# Altium PCB AEON.Feeder.ApplicationBoard.PcbDoc
Units mm, origin at the board's own origin, x right, y up, seen from the top; angles counter-clockwise.
Board outline 58 x 51.33 mm, 4 copper layers (Top Layer, Int1, Int2, Bottom Layer), stack 1.492 mm thick; 33 components, 28 nets, 175 pads, 27 vias.
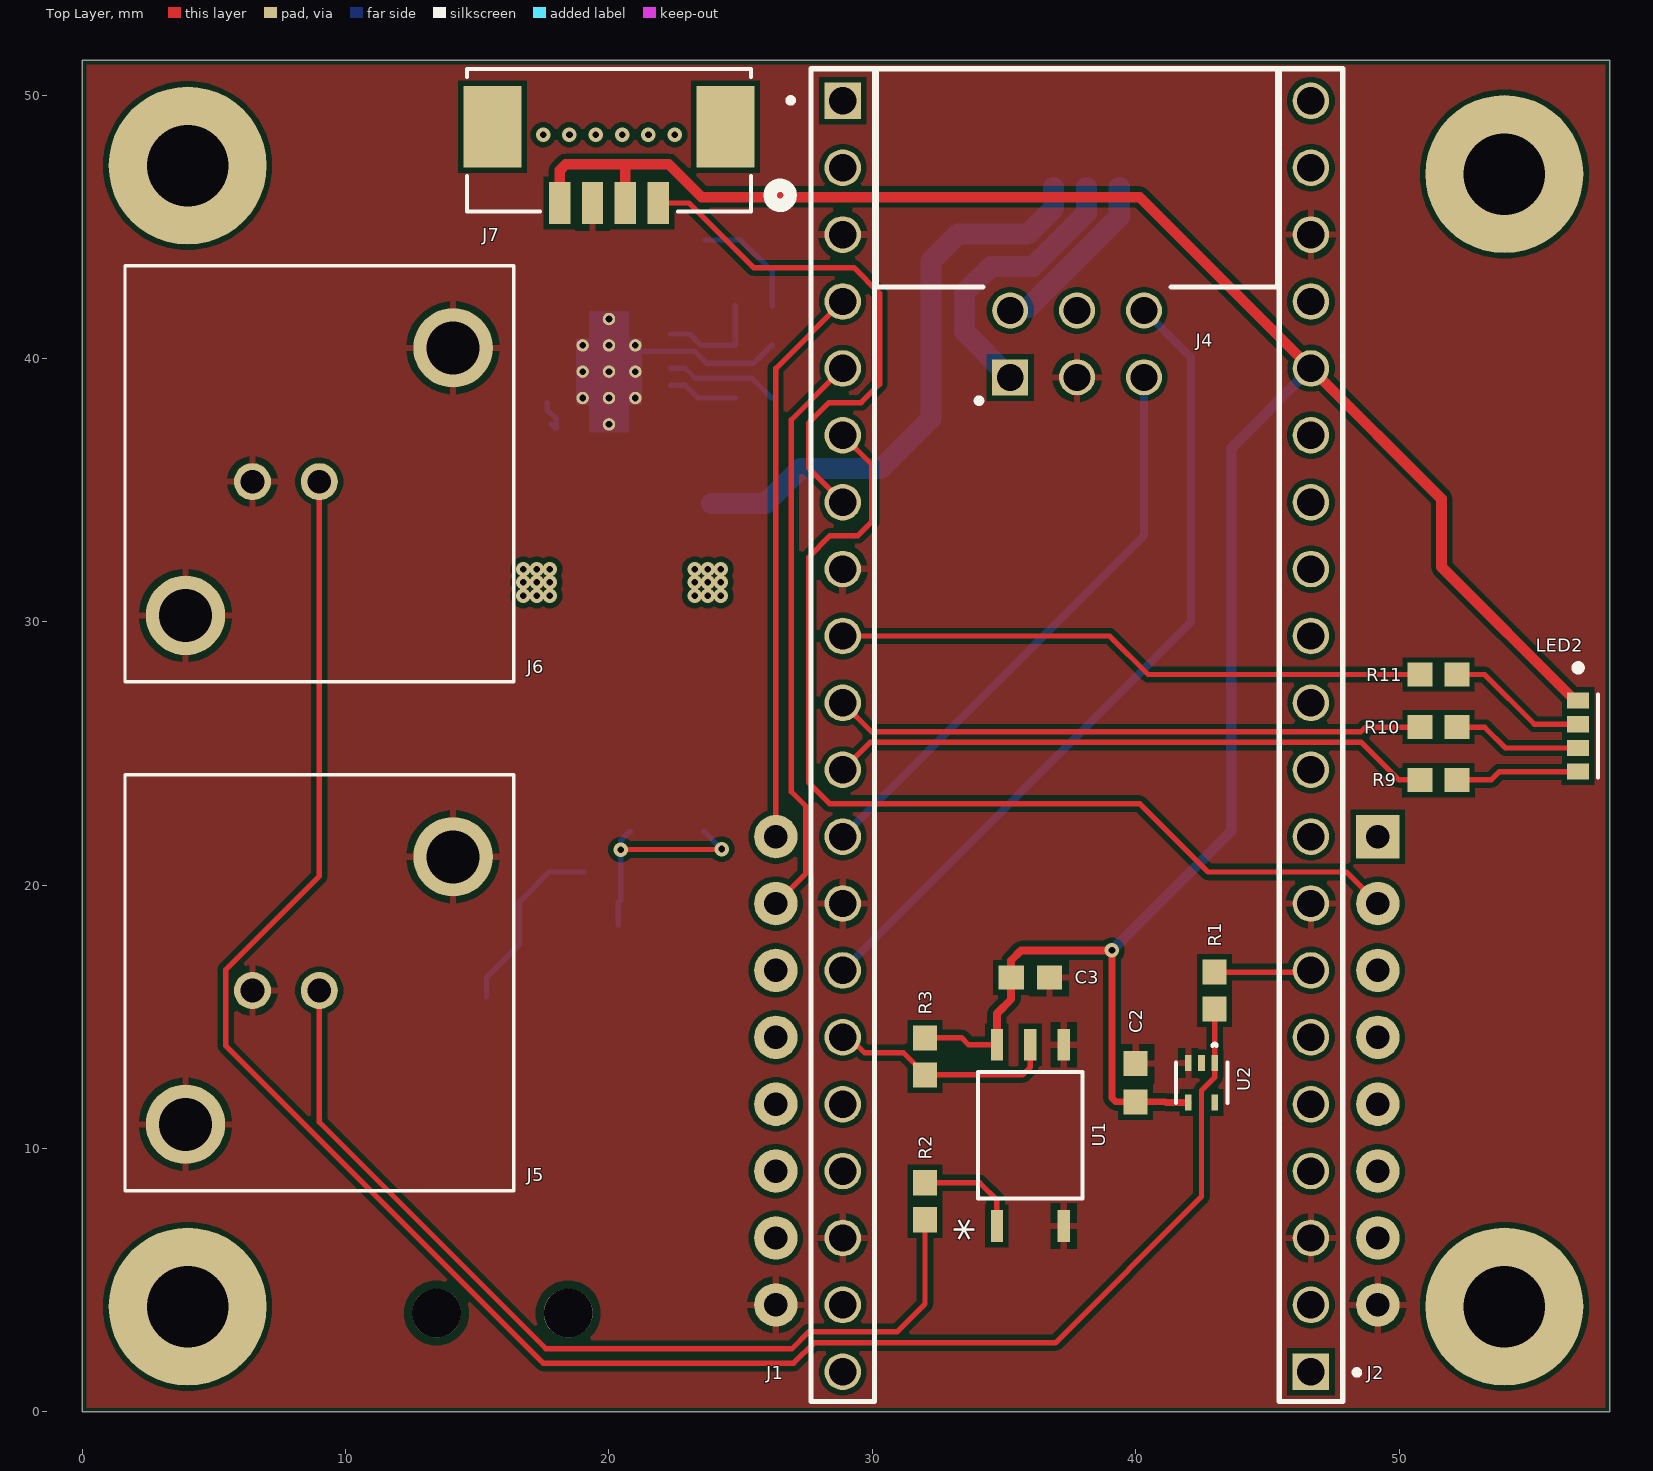
[diagram p0: Top Layer view]
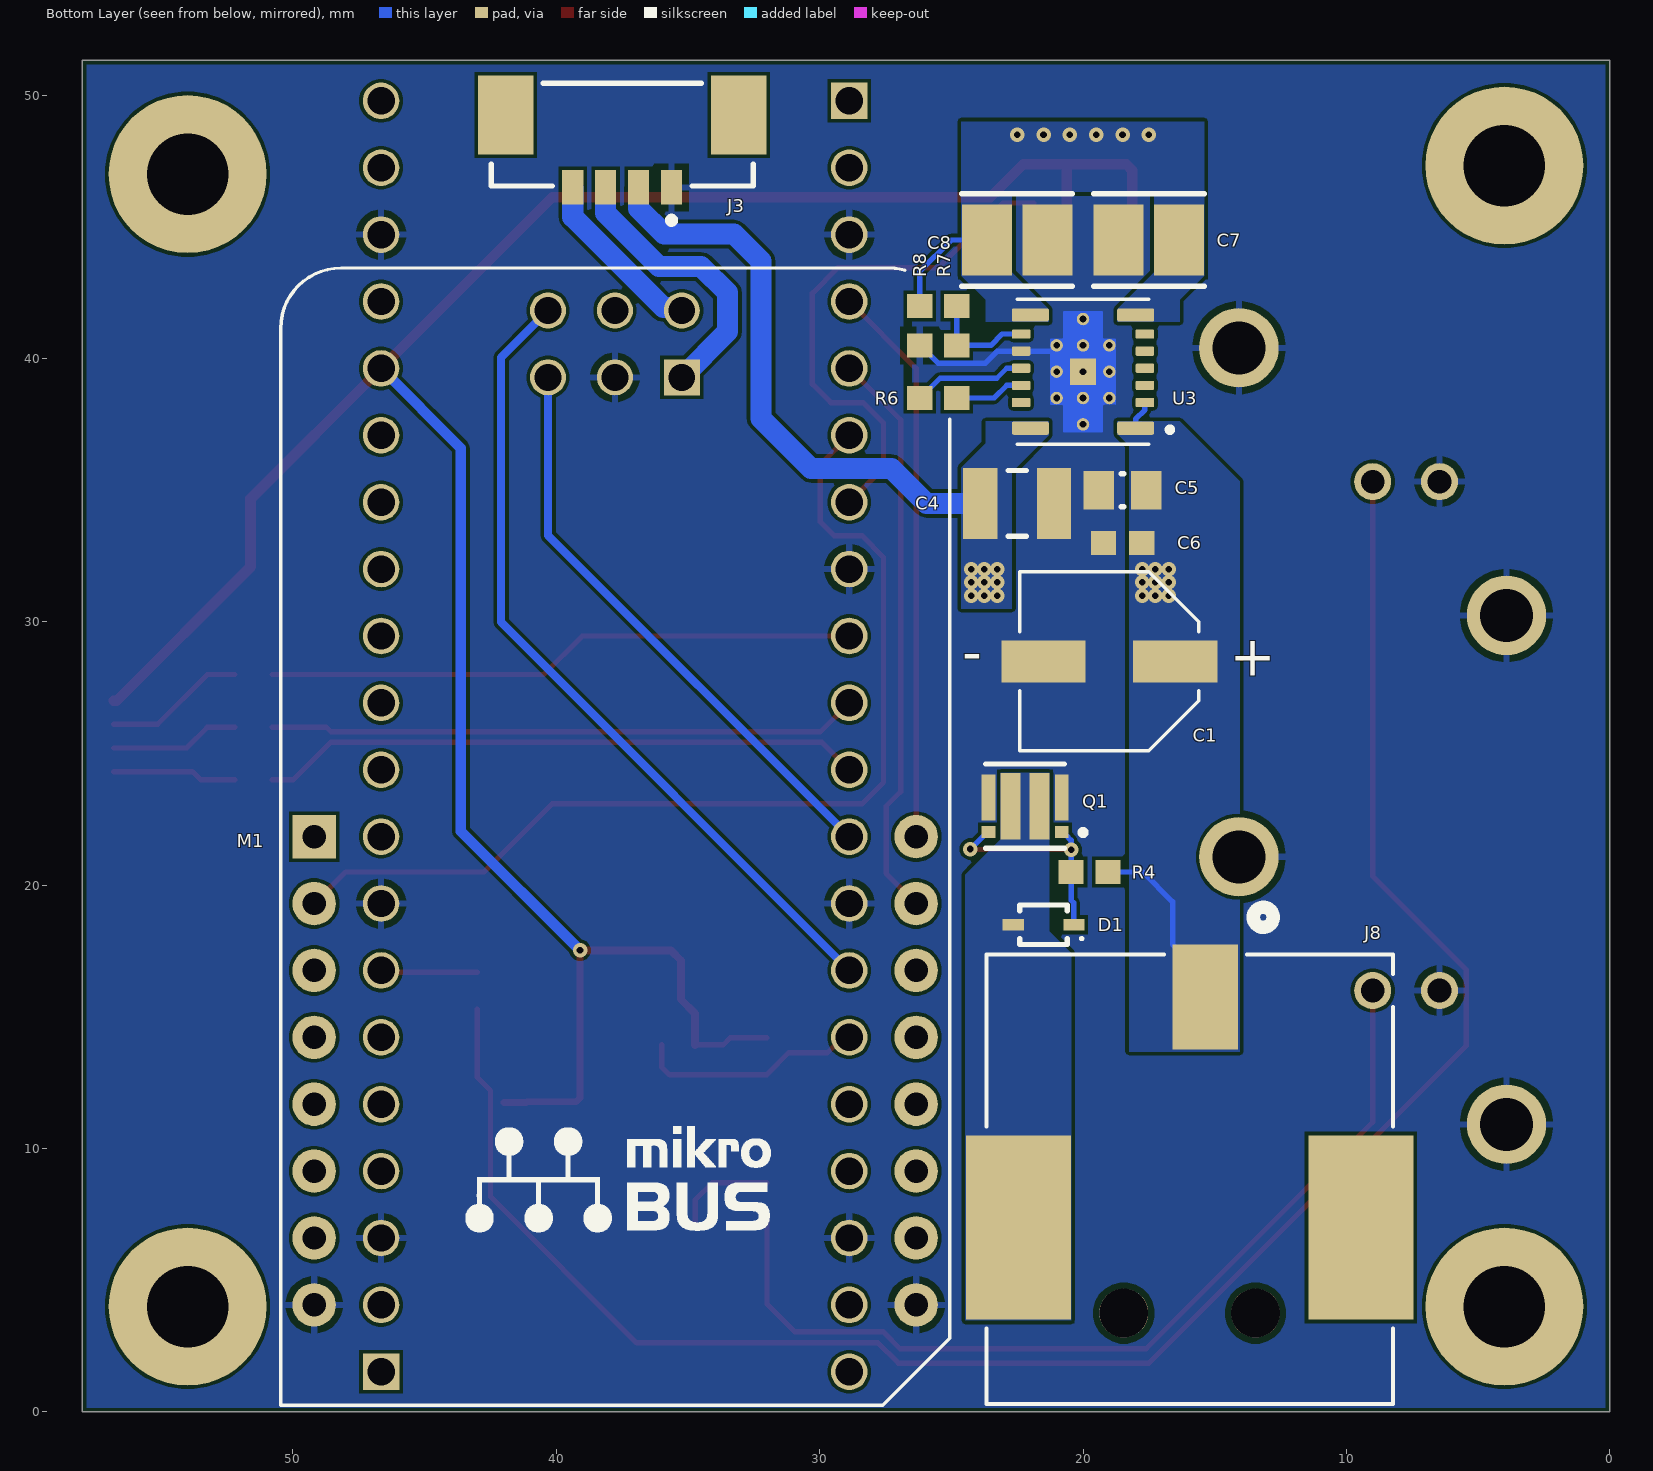
[diagram p1: Bottom Layer view, seen from below]
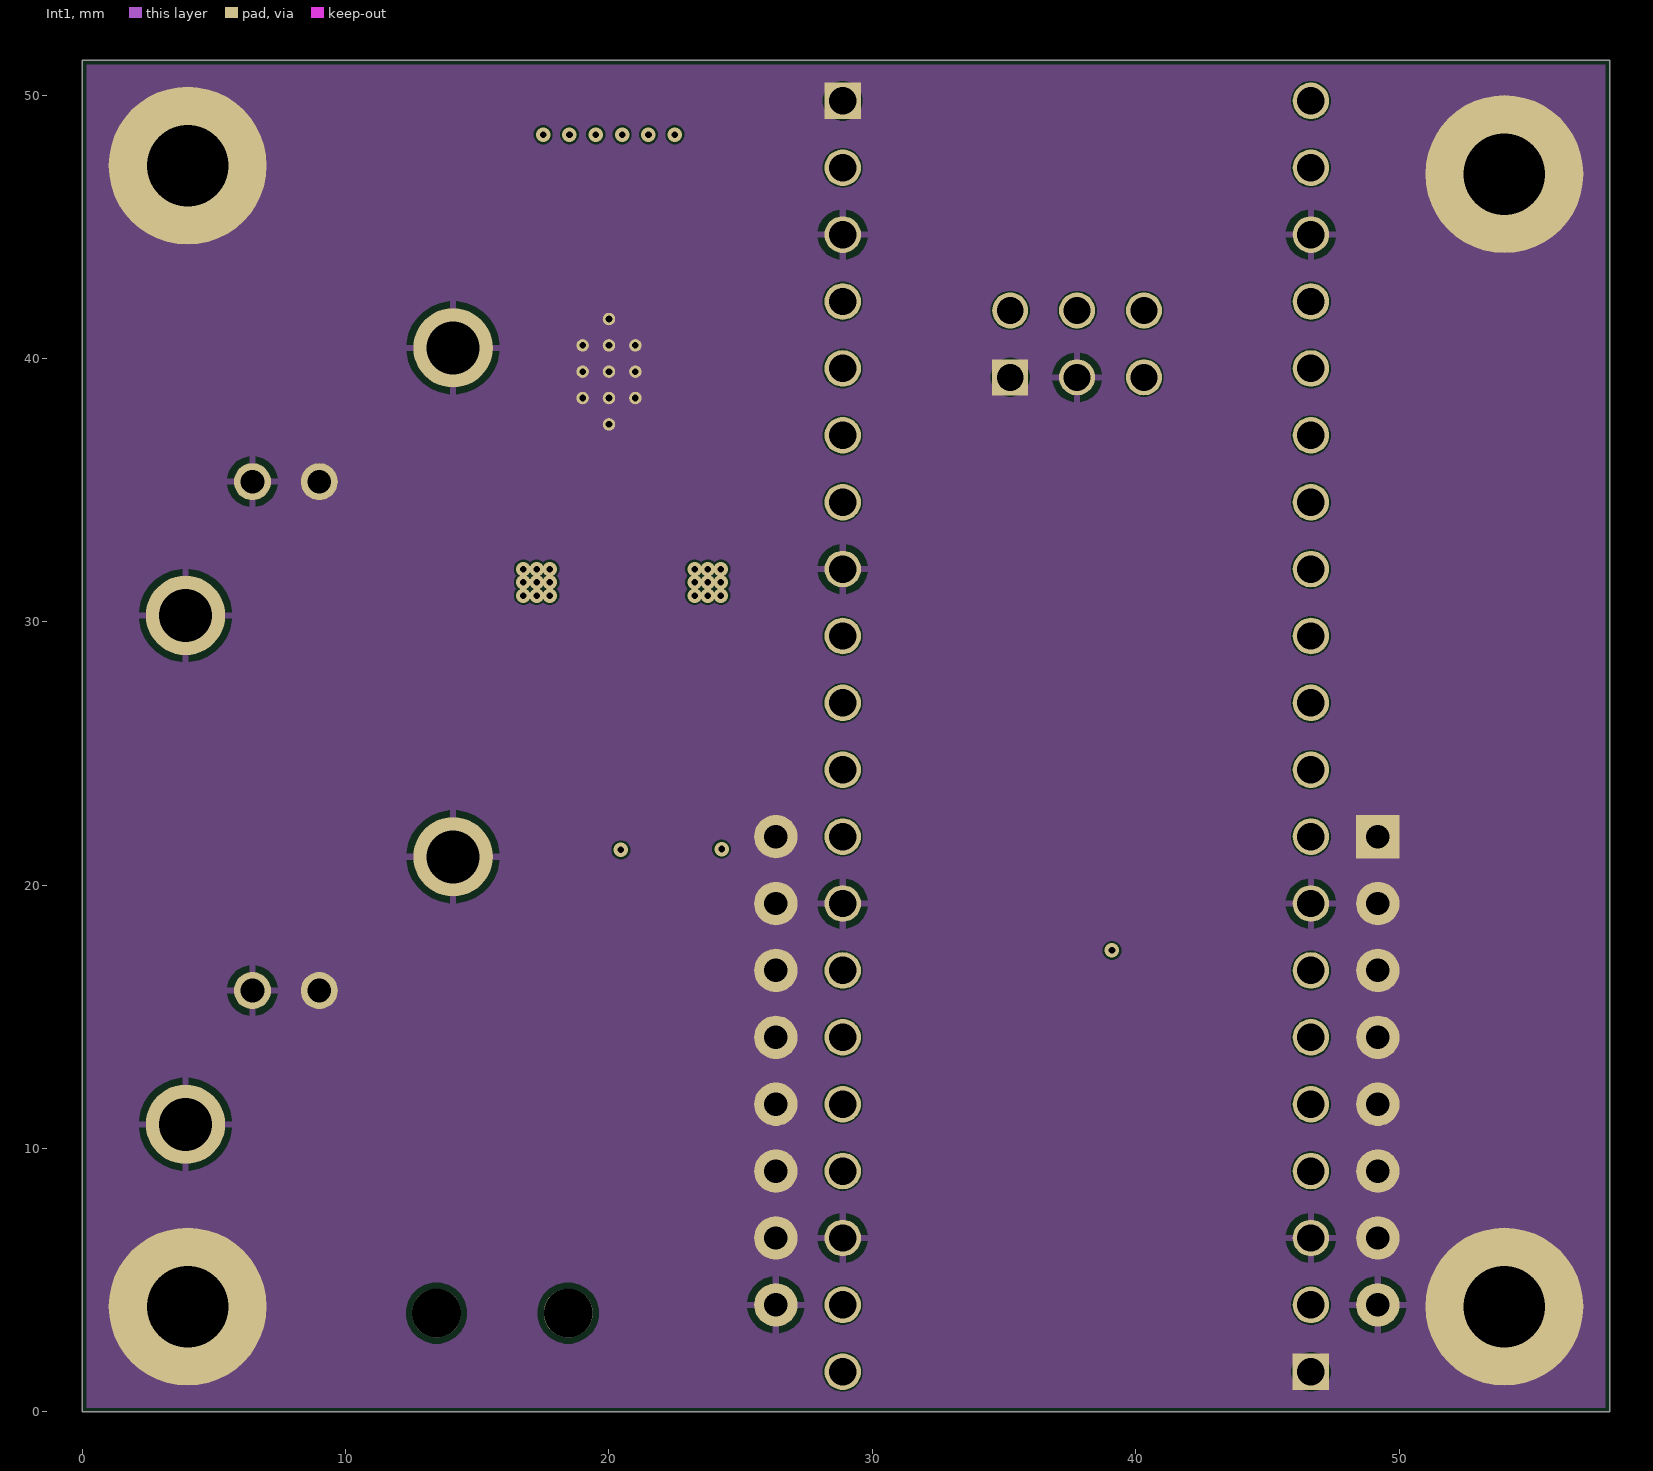
[diagram p2: Int1]
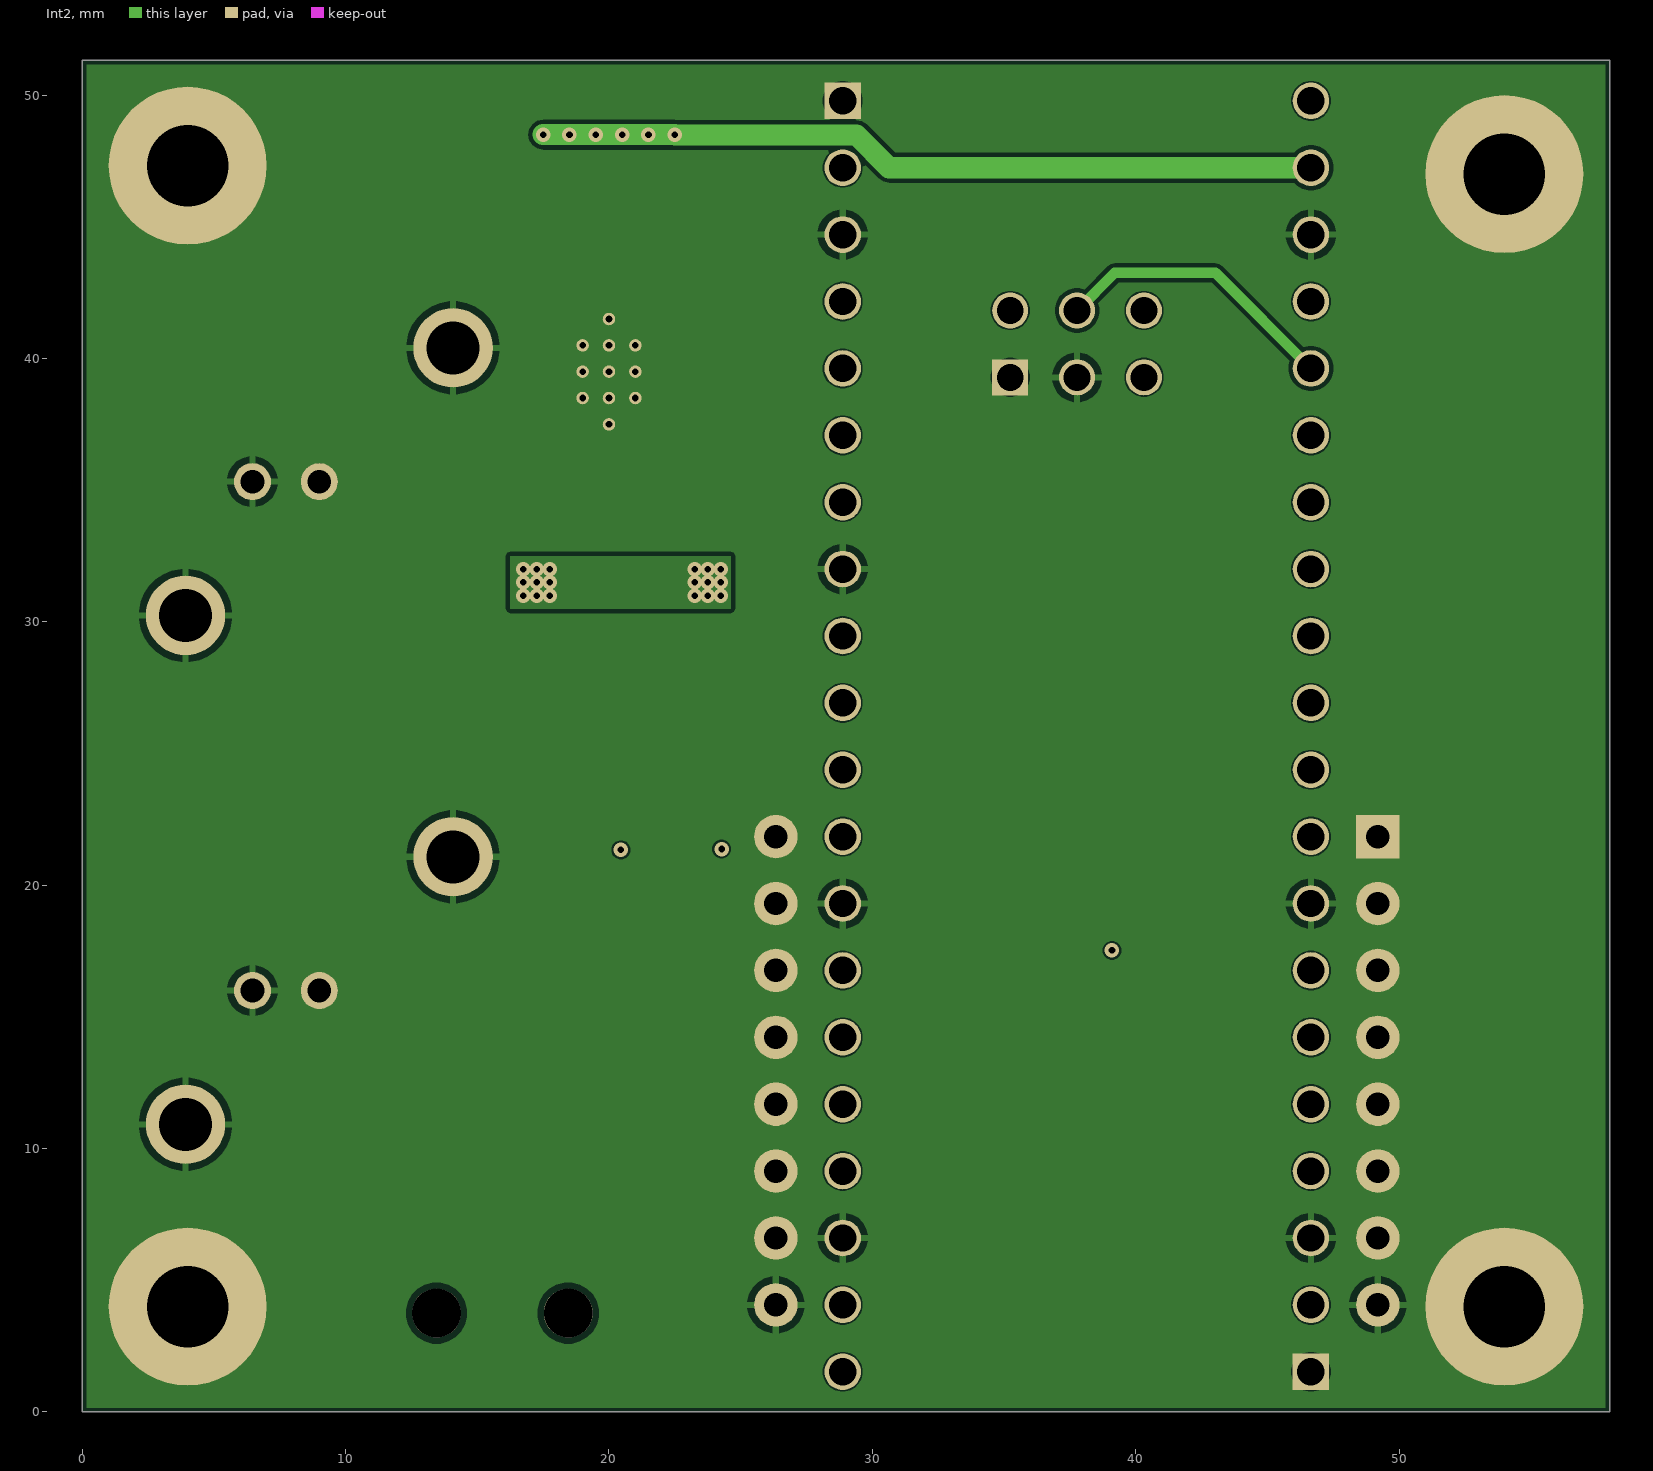
[diagram p3: Int2]
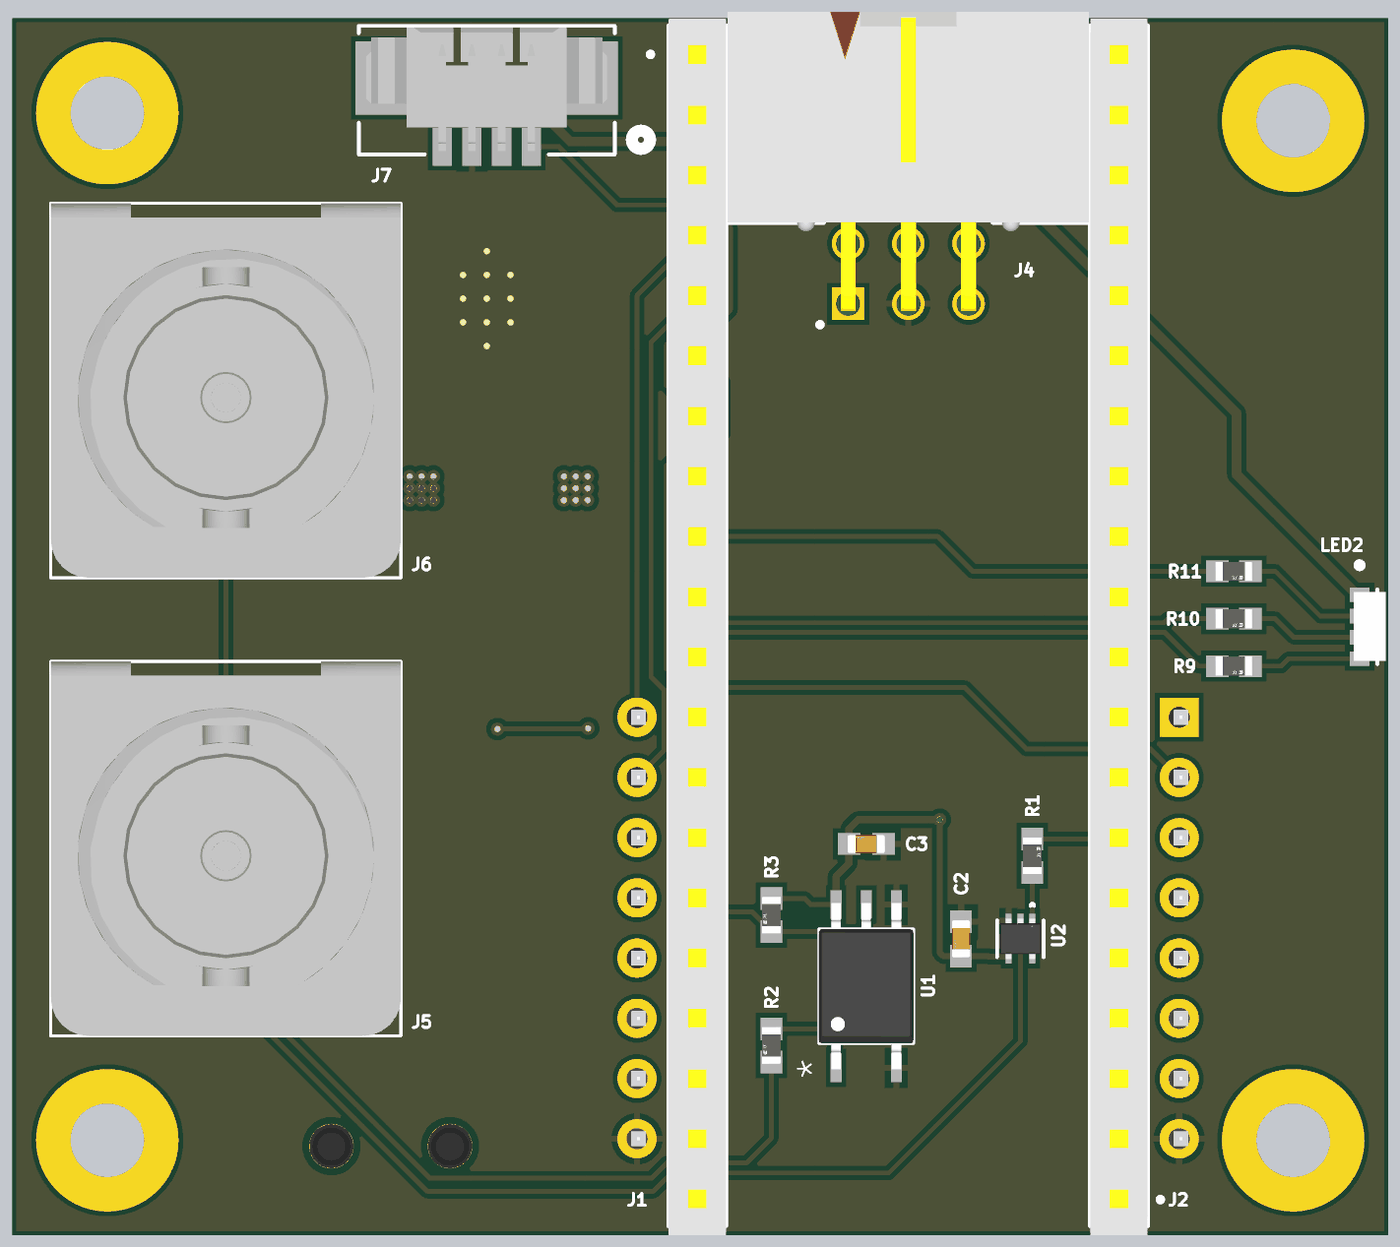
[diagram p4: 3D render of the assembled board from above, using the file's embedded part models]
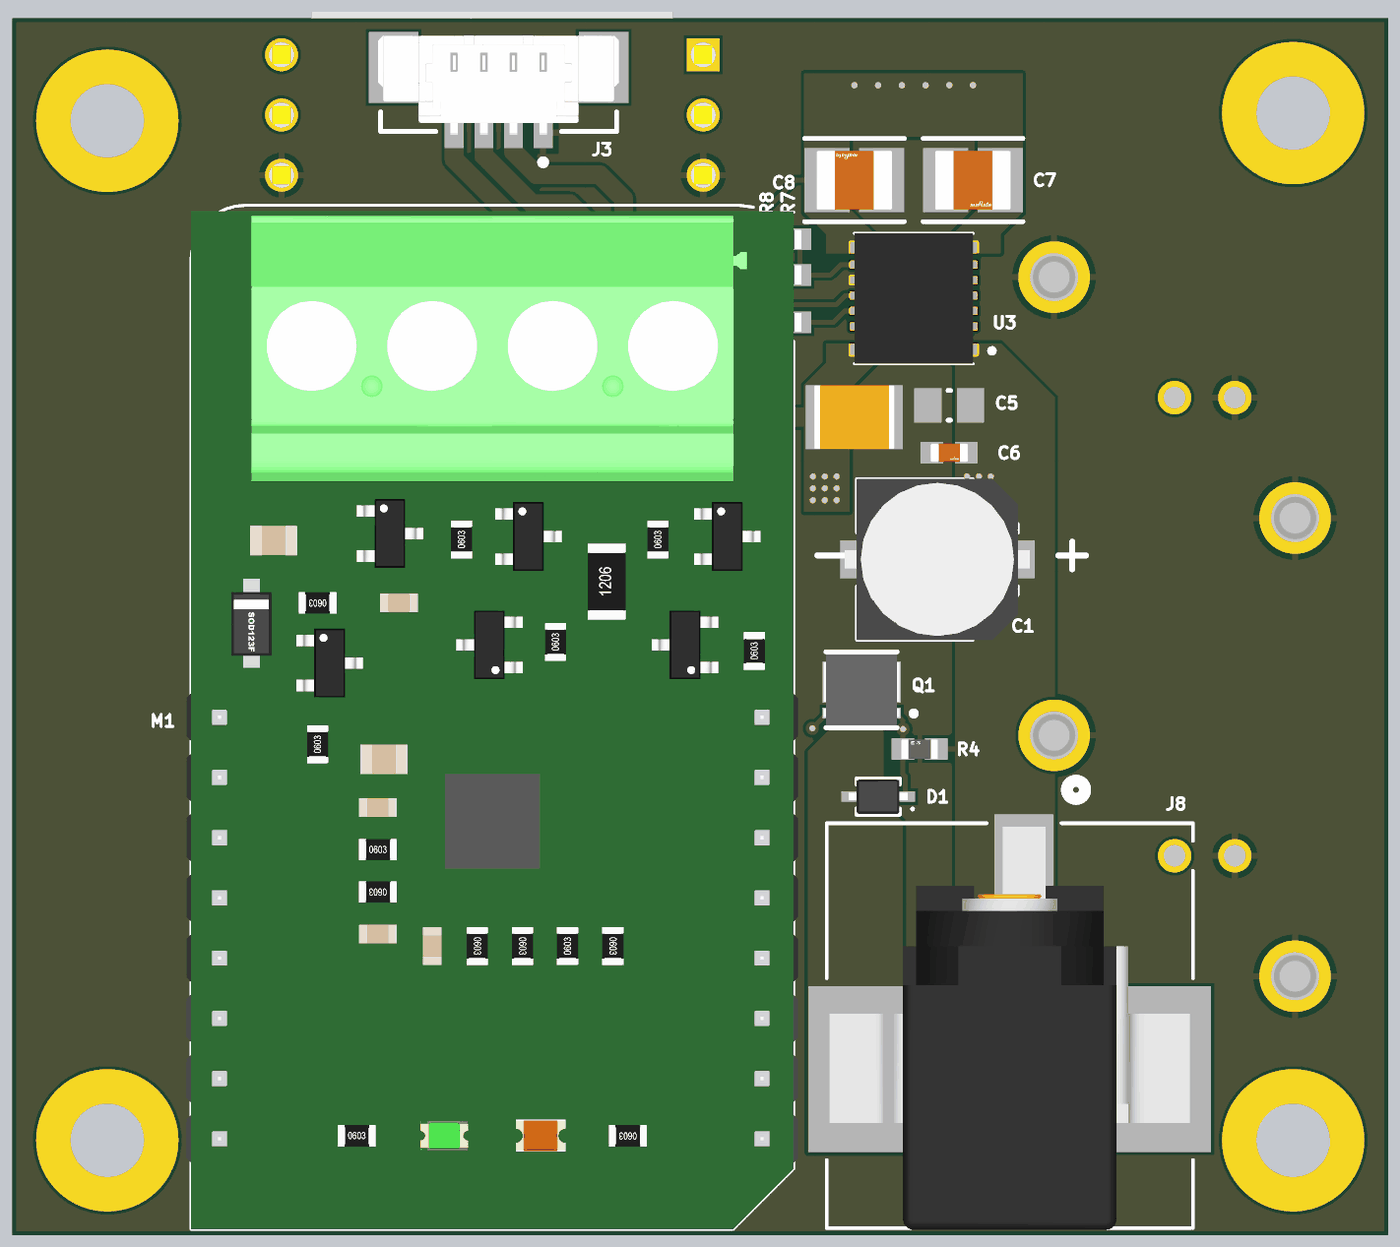
[diagram p5: 3D render of the assembled board from below, using the file's embedded part models]

## Layer stack, top to bottom
Top Solder: solder mask 0.03, SM-001, Dk 4
Top Layer: signal copper 0.0709
Dielectric 1: prepreg 0.059, VT47 - 106, Dk 3.8
Dielectric 2: prepreg 0.059, VT47 - 106, Dk 3.8
Int1: signal copper 0.037
Dielectric 3: core 1.04, VT47 - Core, Dk 4.6
Int2: signal copper 0.037
Dielectric 4: prepreg 0.059, VT47 - 106, Dk 3.8
Dielectric 5: prepreg 0.059, VT47 - 106, Dk 3.8
Bottom Layer: signal copper 0.0709
Bottom Solder: solder mask 0.03, SM-001, Dk 4

## Board outline
0,0 0,51.325 58,51.325 58,0

## Design rules (kind name [scope] priority, off if disabled: settings)
BoardOutlineClearance [All] p1: gap=0.15 ignorepadtopadclearanceinfootprint=FALSE
Clearance "Clearance - Top" [OnLayer('Top Layer')] p1: gap=0.2 ignorepadtopadclearanceinfootprint=TRUE except(0.3: Arc-Hole Track-Hole SMDPad-Hole THPad-Hole Via-Hole Fill-Hole Poly-Hole Region-Hole Text-Hole)
Clearance "Clearance - Bottom" [OnLayer('Bottom Layer')] p2: gap=0.127 ignorepadtopadclearanceinfootprint=TRUE except(0.229: Arc-Hole Track-Hole SMDPad-Hole THPad-Hole Via-Hole Fill-Hole Poly-Hole Region-Hole Text-Hole)
Clearance "Clearance - Int1" [OnLayer('Int1')] p3: gap=0.152 ignorepadtopadclearanceinfootprint=TRUE except(0.229: Arc-Hole Track-Hole SMDPad-Hole THPad-Hole Via-Hole Fill-Hole Poly-Hole Region-Hole)
Clearance "Clearance - Int2" [OnLayer('Int2')] p4: gap=0.152 ignorepadtopadclearanceinfootprint=TRUE except(0.229: Arc-Hole Track-Hole SMDPad-Hole THPad-Hole Via-Hole Fill-Hole Poly-Hole Region-Hole)
ComponentClearance ComponentClearance_J1J4 [InComponent('J1') vs InComponent('J4')] p1: gap=0.001 collisioncheckmode=3 verticalgap=0.254 showdistances=FALSE
ComponentClearance ComponentClearance_J2J4 [InComponent('J2') vs InComponent('J4')] p2: gap=0.001 collisioncheckmode=3 verticalgap=0.254 showdistances=FALSE
ComponentClearance [All] p3: gap=0.254 collisioncheckmode=3 verticalgap=0.254 showdistances=FALSE donotcheckwithout3dbody=TRUE
Height [All] p1: minheight=0 maxheight=40 prefheight=12.7
HoleSize "HoleSize Via - Top-Int1" [InDrillLayerPair('[UVIA] Top Layer - Int1')] p1: absolutevalues=TRUE maxlimit=0.2 minlimit=0.15 maxpercent=80.000 minpercent=20.000
HoleSize "HoleSize Via - Bot-Int2" [InDrillLayerPair('[UVIA] Int2 - Bottom Layer')] p2: absolutevalues=TRUE maxlimit=0.2 minlimit=0.15 maxpercent=80.000 minpercent=20.000
HoleSize [All] p3: absolutevalues=TRUE maxlimit=4 minlimit=0.25 maxpercent=80.000 minpercent=20.000
HoleToHoleClearance [All] p1: gap=0.1 allowstackedmicrovias=TRUE
MinimumAnnularRing MinimumAnnularRing_VIA [IsVia] p1: minimumring=0.075
MinimumAnnularRing [All] p2: minimumring=0.1
MinimumSolderMaskSliver [All] p1: minsoldermaskwidth=0.076
PasteMaskExpansion PasteMaskExpansion_FDMC8030 [HasFootprint('TRANS_FDMC8030')] p1: expansion=0 percent=-20.000000
PasteMaskExpansion PasteMaskExpansion_IC_TPSM5601RSHRDAR [HasFootprint('IC_TPSM5601R5HRDAR')] p2: expansion=0 percent=-20.000000
PasteMaskExpansion PasteMaskExpansion_SOP65P490X110-8N [HasFootprint('SOP65P490X110-8N')] p3: expansion=0 percent=-20.000000
PasteMaskExpansion [All] p4: expansion=0
PolygonConnect PolygonConnect_SOLID [InNetClass('Power Nets')] p1: connectstyle=Direct reliefconductorwidth=0.254 reliefentries=4 polygonreliefangle="90 Angle" airgapwidth=0.254
PolygonConnect PolygonConnect_SOLID_GND [InComponentClass('SolidGND')] p2: connectstyle=Direct reliefconductorwidth=0.254 reliefentries=4 polygonreliefangle="90 Angle" airgapwidth=0.254
PolygonConnect [All] p3: connectstyle=Relief reliefconductorwidth=0.254 reliefentries=4 polygonreliefangle="90 Angle" airgapwidth=0.254
RoutingVias Vias_Top-Bottom [InDrillLayerPair('Top Layer - Bottom Layer')] p1: holewidth=0.25 width=0.55 viastyle="Through Hole" minholewidth=0.25 minwidth=0.5 maxholewidth=0.35 maxwidth=0.65
RoutingVias Vias_Blind_Top-Int1 [InDrillLayerPair('[UVIA] Top Layer - Int1')] p2: holewidth=0.15 width=0.3 viastyle="Through Hole" minholewidth=0.15 minwidth=0.3 maxholewidth=0.25 maxwidth=0.474
RoutingVias Vias_Blind_Bot-Int2 [InDrillLayerPair('[UVIA] Int2 - Bottom Layer')] p3: holewidth=0.15 width=0.3 viastyle="Through Hole" minholewidth=0.15 minwidth=0.3 maxholewidth=0.25 maxwidth=0.474
RoutingVias Vias_Burried [InDrillLayerPair('Int1 - Int2')] p4: holewidth=0.25 width=0.504 viastyle="Through Hole" minholewidth=0.25 minwidth=0.504 maxholewidth=0.35 maxwidth=0.604
SMDEntry [All] p1: side=TRUE corner=TRUE anyangle=FALSE
SilkToSilkClearance [All] p1: silktosilkclearance=0.1
SilkToSolderMaskClearance [IsPad] p1: minsilkscreentomaskgap=0.15 clearancetoexposedcopper=TRUE
SolderMaskExpansion SolderMaskExpansion_Vias [IsVia] p1: expansion=0 istentingtop=TRUE
SolderMaskExpansion [All] p2: expansion=0 istentingtop=FALSE
UnRoutedNet [All] p1: checkbadconnections=TRUE
ViasUnderSMD [All] p1: allowed=TRUE
Width Width_PowerNets [InNetClass('Power Nets')] p1: maxlimit=1 minlimit=0.203 preferedwidth=0.4
Width [All] p2: maxlimit=0.305 minlimit=0.127 preferedwidth=0.203
21 further rules are at their usual default settings.

## Classes and differential pairs
component class SolidGND: C1 C4 C5 C6 C7 C8 Q1 U3
component class PowerSupply: C1 C4 C5 C6 C7 C8 D1 J8 Q1 R4 R6 R7 R8 U3
component class MotorDriver.Mikroe: J3 J4 M1
net class "Power Nets": 3V3 DC24V NetD1_1 OUT1 OUT2 VCC
component class PicoInterface: C2 C3 J1 J2 J5 J6 J7 LED2 R1 R2 R3 R9 R10 R11 U1 U2

## Components (designator, comment, footprint, x,y, rotation, side; value= is the part's Value field where it differs from the comment)
C1 "CPOLD-10uF-50V-20%-Alu" CAP_EEEFK1H100P 19,28.5 r0 bottom value=10µF
C2 "C0603-100nF-100V-10%-X7R" FP-GRM188-0_1-e0_2_0_5-IPC_B 40,12.5 r270 top value=100nF
C3 "C0603-100nF-100V-10%-X7R" FP-GRM188-0_1-e0_2_0_5-IPC_B 36,16.5 r180 top value=100nF
C4 "C1210-10uF-50V-10%-X7R" CAPC3225X279X50NL20T25 22.5,34.5 r0 bottom value=10µF
C5 "C0805-1uF-50V-10%-X7R" CAPC0805(2012)130_N 18.5,35 r180 bottom value=1µF
C6 "C0603-100nF-100V-10%-X7R" FP-GRM188-0_1-e0_2_0_5-IPC_B 18.5,33 r180 bottom value=100nF
C7 "C1210-47uF-10V-10%-X7R" FP-GRM32E-0_3-0_2-IPC_B 17.5,44.5 r180 bottom value=47µF
C8 "C1210-47uF-10V-10%-X7R" FP-GRM32E-0_3-0_2-IPC_B 22.5,44.5 r0 bottom value=47µF
D1 "MM3Z10VB" SODFL250X100-2N 21.5,18.5 r0 bottom
J1 "SSW-120-01-x-S" SAMTEC_SSW-120-01-G-S 28.875,49.785 r270 top locked
J2 "SSW-120-01-x-S - 21-40" "SAMTEC_SSW-120-01-G-S - 21-40" 46.655,1.525 r90 top locked
J3 "53398-0471" FP-533980471-MFG 37.5,48.5 r180 bottom
J4 "TST-103-04-x-D-RA" SAMTEC_TST-103-04-G-D-RA 35.235,39.285 r0 top locked
J5 "1-1337541-0" "TE- 1-1337541-0" 9,16 r0 top locked
J6 "1-1337541-0" "TE- 1-1337541-0" 9,35.325 r0 top locked
J7 "53261-0471" MOLEX_53261-0471 20,48.5 r180 top
J8 "694108105102" WE_694108105102 15.95,8.75 r0 bottom
LED2 "MSL0601RGBU1" LED_MSL06_ROM 56.8,25.662 r90 top
M1 "MIKROE-2699" MIKROE-M 49.195,4.065 r180 bottom locked
Q1 "FDMC8030" TRANS_FDMC8030 22.2,23 r0 bottom
R1 "R0603-150R-1/16W-0.1%" FP-CPF0603-IPC_B 43,16 r270 top value=150
R2 "R0603-270R-1/16W-0.1%" FP-CPF0603-IPC_B 32,8 r90 top value=270
R3 "R0603-360R-1/16W-0.1%" FP-CPF0603-IPC_B 32,13.5 r90 top value=360
R4 "R0603-2k7-1/16W-0.1%" FP-CPF0603-IPC_B 19.75,20.5 r180 bottom value=2.7k
R6 "R0603-100k-1/16W-0.1%" FP-CPF0603-IPC_B 25.5,38.5 r0 bottom value=100k
R7 "R0603-10k-1/16W-0.1%" FP-CPF0603-IPC_B 25.5,42 r0 bottom value=10k
R8 "R0603-2k49-1/16W-0.1%" FP-CPF0603-IPC_B 25.5,40.5 r180 bottom value=2.49k
R9 "R0603-1k5-1/16W-0.1%" FP-CPF0603-IPC_B 51.5,24 r180 top value=1.5k
R10 "R0603-560R-1/16W-0.1%" FP-CPF0603-IPC_B 51.5,26 r180 top value=560
R11 "R0603-470R-1/16W-0.1%" FP-CPF0603-IPC_B 51.5,28 r180 top value=470
U1 "TLP2368" "5pin SO6_TOS" 36,10.5 r90 top
U2 "TPD3E001DRLR" DRL5_TEX 42.5,12.5 r270 top
U3 "TPSM5601R5HRDAR" IC_TPSM5601R5HRDAR 20,39.5 r0 bottom

## Footprints (in the part's own frame and the unit in brackets; to place one, negate y for a bottom-side part, rotate by r counter-clockwise, add the part's x,y. Pads: shape width x height; smd on the part's side, far side on the other; paste and mask are expansions set on the pad)
"5pin SO6_TOS" [mil]
  rect 47.56x18.36 smd paste+0 mask+0: 1(-135.5,50) 3(-135.5,-50) 4(135.5,-50) 5(135.5,0) 6(135.5,50)
  silkscreen extent -94,-78 94,78, body extent -138,-79 138,79, height 87
CAP_EEEFK1H100P [mm] "Panasonic FK series Size D"
  rect 3.2x1.6 smd: 1(-2.5,0) 2(2.5,0)
  silkscreen extent -3.4,-3.4 3.4,3.4, body extent -3.9,-3.4 3.9,3.4, height 6.15
CAPC0805(2012)130_N [mm] "Chip Capacitor, Body 2.0x1.2mm, Height 1.3mm, IPC Medium Density"
  rect 1.15x1.45 smd: 1(-0.9,0) 2(0.9,0)
  silkscreen extent -0.05,-0.62 0.05,0.63, body extent -1.1,-0.72 1.1,0.73, height 1.3
CAPC3225X279X50NL20T25 [mm] "Chip Capacitor, 2-Leads, Body 3.40x2.70mm, IPC Medium Density"
  rect 1.3x2.7 smd: 1(-1.4,0) 2(1.4,0)
  silkscreen extent -0.35,-1.25 0.35,1.25, body extent -1.7,-1.35 1.7,1.35, height 2.79
DRL5_TEX [mil] "5-SOT-5X3"
  rect 24x10 smd paste+0 mask+0: 1(-29.5,19.68) 2(-29.5,0) 3(-29.5,-19.68) 4(29.5,19.68) 5(29.5,-19.68)
  silkscreen extent -58,-39 31,39, body extent -34,-34 34,34, height 24
FP-533980471-MFG [mm]
  rect 0.8x1.3 smd paste+0 mask+0: 1(1.875,-2) 2(0.625,-2) 3(-0.625,-2) 4(-1.875,-2)
  rect 2.1x3 smd paste+0 mask+0: 5(-4.425,0.75) 6(4.425,0.75)
  silkscreen extent -4.97,-3.37 4.97,1.95, body extent -5.07,-2.1 5.07,2.1, height 5.1
FP-CPF0603-IPC_B [mm]
  rect 0.958x0.912 smd paste+0 mask+0: 1(-0.702,0) 2(0.702,0)
  body extent -1.43,-0.71 1.43,0.71, height 0.25
FP-GRM32E-0_3-0_2-IPC_B [mm]
  rect 1.903x2.706 smd paste+0 mask+0: 1(-1.151,0) 2(1.151,0)
  silkscreen extent -2.1,-1.75 2.1,1.75, body extent -1.6,-1.25 1.6,1.25, height 2.7
FP-GRM188-0_1-e0_2_0_5-IPC_B [mm]
  rect 0.959x0.912 smd paste+0 mask+0: 1(-0.727,0) 2(0.727,0)
  body extent -1.46,-0.71 1.46,0.71, height 0.25
IC_TPSM5601R5HRDAR [mm] "TI - 15-Pin QFN RDA Package - RDA0015A - B3QFN"
  rrect25% 1.4x0.5 smd paste-2 mask+0: 1(-2,2.145) 7(-2,-2.155) 8(2,-2.155) 14(2,2.145)
  rrect25% 0.7x0.35 smd paste-1 mask+0: 2(-2.35,1.17) 3(-2.35,0.52) 4(-2.35,-0.13) 5(-2.35,-0.78) 6(-2.35,-1.43) 9(2.35,-1.43) 10(2.35,-0.78) 11(2.35,-0.13) 12(2.35,0.52) 13(2.35,1.17)
  rect 1x1 smd paste-1 mask+0: 15(0,0)
  round 0.474 hole 0.25 mask+0: 16(0,2) 17(-1,1) 18(0,1) 19(1,1) 20(-1,0) 21(0,0) 22(1,0) 23(-1,-1) 24(0,-1) 25(1,-1) 26(0,-2)
  Top Layer region: 373 vertices and 0 holes, not listed, extent -1.25,-2.3 1.25,2.3
  silkscreen extent -3.4,-2.75 2.5,2.75, body extent -2.5,-2.75 2.5,2.75, height 4.1
LED_MSL06_ROM [mil]
  rect 24x33 smd paste+0 mask+0: 1(53.15,0) 2(17.72,0) 3(-17.72,0) 4(-53.15,0)
  silkscreen extent -62,-30 107,5, body extent -57,-43 58,10, height 39
MIKROE-M [mil] "MikroBUS Medium size board"
  rect 65x65 hole 35: 1(0,700)
  round 65 hole 35: 2(0,600) 3(0,500) 4(0,400) 5(0,300) 6(0,200) 7(0,100) 8(0,0) 9(900,0) 10(900,100) 11(900,200) 12(900,300) 13(900,400) 14(900,500) 15(900,600) 16(900,700)
  silkscreen extent -50,-150 950,1550, body extent -58,-150 957,1540, height 883
MOLEX_53261-0471 [mil] "UL"
  rect 32x63 smd paste+0 mask+0: 1(-73.82,102.13) 2(-24.61,102.13) 3(24.61,102.13) 4(73.82,102.13)
  rect 87x122 smd: 5(-174.21,-12.05) 6(174.21,-12.05)
  silkscreen extent -271,-98 212,115, body extent -200,-95 200,109, height 134
SAMTEC_SSW-120-01-G-S [mm] "Socket Strip, 0.100\" Pitch"
  rect 1.39x1.39 hole 1.04: 1(0,0)
  round 1.39 hole 1.04: 2(2.54,0) 3(5.08,0) 4(7.62,0) 5(10.16,0) 6(12.7,0) 7(15.24,0) 8(17.78,0) 9(20.32,0) 10(22.86,0) 11(25.4,0) 12(27.94,0) 13(30.48,0) 14(33.02,0) 15(35.56,0) 16(38.1,0) 17(40.64,0) 18(43.18,0) 19(45.72,0) 20(48.26,0)
  silkscreen extent -1.21,-2.07 49.39,1.21, body extent -1.52,-1.21 49.78,1.21, height 8.51
"SAMTEC_SSW-120-01-G-S - 21-40" [mm] "Socket Strip, 0.100\" Pitch (pins 21 - 40)"
  rect 1.39x1.39 hole 1.04: 21(0,0)
  round 1.39 hole 1.04: 22(2.54,0) 23(5.08,0) 24(7.62,0) 25(10.16,0) 26(12.7,0) 27(15.24,0) 28(17.78,0) 29(20.32,0) 30(22.86,0) 31(25.4,0) 32(27.94,0) 33(30.48,0) 34(33.02,0) 35(35.56,0) 36(38.1,0) 37(40.64,0) 38(43.18,0) 39(45.72,0) 40(48.26,0)
  silkscreen extent -1.13,-1.85 49.47,1.21, body extent -1.52,-1.21 49.78,1.21, height 8.51
SAMTEC_TST-103-04-G-D-RA [mm] "SnapEDA"
  rect 1.37x1.37 hole 1.02: 1(0,0)
  round 1.37 hole 1.02: 2(0,2.54) 3(2.54,0) 4(2.54,2.54) 5(5.08,0) 6(5.08,2.54)
  silkscreen extent -5.08,-0.98 10.16,11.72, body extent -5.08,-0.32 10.16,12.32, height 9.27
SODFL250X100-2N [mm] "SODFL, 2-Leads, Body 1.30x2.50mm, IPC Medium Density"
  rect 0.8x0.45 smd: 1(1.15,0) 2(-1.15,0)
  silkscreen extent -1.5,-0.75 0.9,0.75, body extent -1.25,-0.72 1.25,0.72, height 1
"TE- 1-1337541-0" [mm] "RF / Coaxial Connector, BNC Coaxial, Straight Jack, Solder"
  round 1.408 hole 0.9: 1(0,0) 2(-2.54,0)
  round 3.015 hole 2.01: SH1(5.08,5.08) SH2(-5.08,-5.08)
  silkscreen extent -7.38,-7.6 7.38,8.2, body extent -7.38,-7.6 7.38,8.2, height 35.5
TRANS_FDMC8030 [mm] "ONSEMI_WDFN-8"
  rect 0.52x0.45 smd: 1(-1.39,0.975) 8(1.39,0.975)
  rect 0.52x1.75 smd: 4(-1.39,-0.325) 5(1.39,-0.325)
  rect 0.75x2.52 smd: 9(0.55,0) 10(-0.55,0)
  silkscreen extent -2.31,-1.6 1.5,1.6, body extent -1.61,-1.5 1.61,1.5, height 0.91
WE_694108105102 [mil]
  rect 98x157 smd paste+0 mask+0: 1(-23.62,-275.74)
  rect 157x275.59 smd: 2(255.91,68.75) 3(-255.91,68.75)
  round 73 hole 73: 4(-98.43,196.7) 5(98.43,196.7)
  silkscreen extent -304,-410 304,333, body extent -299,-334 299,335, height 433

## Part data
C1: library part CMP-612-0001-7, "10µF ±20% 50V SMD Aluminum Electrolytic Capacitor Surface Mount D", Capacitance=10uF, Capacitor Type=Electrolytic, Case/Package=CPOLD, ESR (Equivalent Series Resistance)=880mR, Leakage Current=3uA, Max Operating Temperature=105°C, Min Operating Temperature=-55°C, Package Quantity=1000, Ripple Current=165mA, Tolerance=20%, Voltage=50V, Construction=Cylindrical, Contact Plating=Tin, Diameter=6.3mm, Height=5.8mm, Height - Seated (Max)=0.24inch, Impedance=880mR, Lead Diameter=0.65mm, Lead Free="Lead Free", Lead Pitch=1.8mm, Length=5.8mm, Life (Hours)=2000Hour, Mount="Surface Mount,PCB", Number of Pins=2, Packaging="Tape and Reel", Pick&PlaceFootprint=CPOLD, Polarity=Polar, Radiation Hardening=No, REACH SVHC="No SVHC", Ripple Current (AC)=165mA, RoHS=Yes, RoHS Compliant=Yes, Series=FK, Size=5.8mm, Termination=SMD/SMT, Voltage rating=50V, Voltage Rating (DC)=50V, Width=7.8mm
C2 C3 C6: library part CMP-611-0027-15, "0.1µF ±10% 100V Ceramic Capacitor X7R 0603 (1608 Metric)", Capacitance=100nF, Capacitor Type=Ceramic, Case Code (Imperial)=0603, Case Code (Metric)=1608, Dielectric=X7R, Max Operating Temperature=125°C, Min Operating Temperature=-55°C, Package Quantity=1, Tolerance=10%, Voltage=100V, Case/Package=0603, Construction=Flat, Depth=0.8mm, Height=0.8mm, Lead Free="Lead Free", Length=1.6mm, Material=Ceramic, Mount="Surface Mount", Packaging="Tape and Reel", Pick&PlaceFootprint=0603_CAP, Radiation Hardening=No, REACH SVHC="No SVHC", RoHS=Yes, RoHS Compliant=Yes, Series=GRM, Size=0.8mm, Termination=SMD/SMT, Thickness=0.035inch, Voltage rating=100V, Voltage Rating (DC)=100V, Weight=0.000222oz, Width=0.8mm
C4: library part CMP-611-0024-5, "10uF ±10% 50V Ceramic Capacitor X7R 1210 (3225 Metric)", Capacitance=10uF, Capacitor Type=Ceramic, Case/Package=1210, Dielectric=X7R, Tolerance=10%, Voltage rating=50V, Mount="Surface Mount", Pick&PlaceFootprint=C1210, RoHS=Yes
C5: library part CMP-611-0023-3, "1uF ±10% 50V Ceramic Capacitor X7R 0805 (2012 Metric)", Capacitance=1uF, Capacitor Type=Ceramic, Case Code (Imperial)=0805, Case Code (Metric)=2012, Tolerance=10%, Voltage rating=50V, Case/Package=0805, Mount=SMD, Pick&PlaceFootprint=C0805, RoHS=Yes
C7 C8: library part CMP-611-0031-10, "47uF ±10% 10V Ceramic Capacitor X7R 1210 (3225 Metric)", Capacitance=47uF, Capacitor Type=Ceramic, Case Code (Imperial)=1210, Case Code (Metric)=3225, Dielectric=X7R, Max Operating Temperature=125°C, Min Operating Temperature=-55°C, Package Quantity=1, Tolerance=10%, Voltage=10V, Case/Package=1210, Construction=Flat, Depth=2.5mm, Height=2.5mm, Lead Free="Lead Free", Length=3.2mm, Material=Ceramic, Mount="Surface Mount", Number of Pins=2, Packaging="Tape and Reel", Pick&PlaceFootprint=C1210, Radiation Hardening=No, REACH SVHC="No SVHC", RoHS=Yes, RoHS Compliant=Yes, Series=GRM, Termination=SMD/SMT, Thickness=0.106inch, Voltage rating=10V, Voltage Rating (DC)=10V, Width=2.5mm
D1: library part CMP-822-0001-1, "DIODE ZENER 10V 200MW SOD323F", Forward Voltage=1V, Max Operating Temperature=150°C, Max Power Dissipation=200mW, Max Reverse Current=180nA, Min Operating Temperature=-65°C, Package Quantity=1, PartNumber=MM3Z5V1B, Peak Reverse Current=1.8uA, Test Current=5mA, Tolerance=2%, Working Voltage=10V, Contact Plating="Tin, Matte", Element Configuration=Single, ESD Protection=No, Height=1mm, Impedance=18R, Lead Free="Lead Free", Length=1.3mm, Max Reverse Leakage Current=180nA, Mount="Surface Mount", Number of Pins=2, Packaging="Tape and Reel", Power Dissipation=200mW, Radiation Hardening=No, REACH SVHC="No SVHC", RoHS Compliant=Yes, Voltage Tolerance=2%, Weight=0.0276g, Width=1.7mm, Zener Voltage=10V
J1: library part CMP-310-0034-2, "Conn Socket Strip SKT 20 POS 2.54mm Solder ST Thru-Hole", Color=Black, Contact Material=Bronze, Contact Plating=Gold, Gender=Female, Mating Cycles=100, Mount="Through Hole", Number of Contacts=20, Number of Rows=1, Pitch=2.54mm, RoHS Compliant=Yes, Termination=Solder
J2: library part CMP-310-0035-1, "Conn Socket Strip SKT 20 POS 2.54mm Solder ST Thru-Hole (pins 21 - 40)", Color=Black, Contact Material=Bronze, Contact Plating=Gold, Gender=Female, Mating Cycles=100, Mount="Through Hole", Number of Contacts=20, Number of Rows=1, Pitch=2.54mm, RoHS Compliant=Yes, Termination=Solder
J3: library part CMP-370-0030-2, "Board Connector, 4 Contact(s), 1 Row(s), Male, Straight, 0.049 inch Pitch, Surface Mount Terminal, Locking, Natural Insulator, Receptacle", Contact Resistance=20mR, Dielectric Withstanding Voltage (AC)=250V, Flammability Rating="UL94 V-0", Insulation Color=Natural, Insulation Resistance=100MR, Max Operating Temperature=85°C, Min Operating Temperature=-40°C, Rated Current (Signal)=1A, Board Mounting Option="FITTING NAIL", Body Breadth=0.146inch, Body Depth=0.185inch, Body Length=0.383inch, Body/Shell Style=RECEPTACLE, Connector Type="BOARD CONNECTOR", Contact Finish - Mating="MATTE TIN (39) OVER NICKEL", Contact Finish - Termination="Matte Tin (Sn) - with Nickel (Ni) barrier", Contact Gender=Male, Contact Material=Bronze, Contact Pattern=RECTANGULAR, Contact Style="Blade Pin", DIN Conformance=No, Durability=30Cycles, Filter Feature=No, IEC Conformance=No, Insulation Material=Polyamide, JESD-609 Code=e3, Mating Contact Pitch=0.049inch, Mating Information="MULTIPLE MATING PARTS AVAILABLE", MIL Conformance=No, Mixed Contacts=No, Mount=Board, Mounting Option 1=LOCKING, Mounting Style=STRAIGHT, Number Of Connectors=1, Number of Contacts=4, Number Of PCB Rows=1, Number of Rows Loaded=1, Option="General Purpose", PartNumber=53398-0471, PCB Contact Pattern=RECTANGULAR, Plating Thickness=39uin, Polarization Key="POLARIZED HOUSING", REACH SVHC=Yes, Reference Standard=UL, Reliability=COMMERCIAL, RoHS Compliant=Yes, Terminal Pitch=1.25mm, Termination=SMD/SMT
J4: library part CMP-370-0023-6, "Board Connector, 6 Contact(s), 2 Row(s), Male, Right Angle, Solder Terminal", PartNumber=TST-103-04-G-D-RA, Mount="Through Hole", Number of Contacts=6, Number of Rows=2, Pitch=2.54
J5 J6: library part CMP-730-0000-5, "TE CONNECTIVITY / GREENPAR         1-1337541-0            RF / Coaxial Connector, BNC Coaxial, Straight Jack, Solder, 50 ohm, Brass", Colour=White, Dielectric Material=PE, Frequency=4GHz, Insulation Resistance=5GR, Max Operating Temperature=85°C, Min Operating Temperature=-55°C, Package Quantity=100, Body Material=Zinc, Body Plating=Nickel, Connector Type="BNC, Jack", Contact Material=Brass, Contact Plating=Gold, Depth=15.8mm, ELV=Compliant, Fastening Type=Bayonet, Gender=Female, Housing Colour=White, Housing Material=Polyester, Impedance=50R, Insulation Material=Polybutylene, Length=14.76mm, Max Frequency=4GHz, Mount=Panel, Number of Positions=1, Orientation=Straight, Packaging=Box, PartNumber=1-1337541-0, PCB Mount Retention=With, PCB Mounting Orientation=Vertical, PCB Thickness=0.126inch, Plating=Nickel, Polarity=Normal, Radiation Hardening=No, REACH SVHC=Unknown, Sealable="No (Without)", Tail Length=5.8mm, Termination=Solder
J7: library part CMP-370-0017-6, "MOLEX 1.25mm (.049\") Pitch PicoBlade Header, Surface Mount, Right Angle, Lead-free, 4 Circuits", Color=Beige, Contact Resistance=20mR, Current rating=1A, Flammability Rating="UL94 V-0", Housing Color=Natural, Insulation Resistance=100MR, Max Operating Temperature=105°C, Min Operating Temperature=-40°C, Package Quantity=1000, Voltage rating=125V, Case/Package=53261-0471, Contact Gender=Male, Contact Material=Tin, Contact Plating=Tin, Contact Type=-, Gender=Male, Glow Wire Compliant=Non-compliant, Housing Material=Thermoplastic, Lead Free="Lead Free", Lead Pitch=1.25mm, Mount="Surface Mount", Number of Circuits=4, Number of Contacts=4, Number of Positions=4, Number of Rows=1, Orientation="Right Angle", Packaging="Cut Tape", Pitch=1.25mm, Radiation Hardening=No, REACH SVHC=Unknown, Series=53261, Termination=SMD/SMT, Voltage Rating (AC)=125V, Voltage Rating (DC)=125V, Weight=0.005598oz, Working Voltage=125V
J8: library part CMP-360-0003-3, "DC Power Connectors WR-DC PwrJk CtrPnSMT Right Angled W/Peg", Color=Black, Current rating=5A, Flammability Rating="UL94 V-0", Insulation Resistance=100MR, Max Operating Temperature=85°C, Min Operating Temperature=-40°C, Package Quantity=200, Voltage rating=24V, Connector Type=Jack,Power, Contact Gender=Female, Contact Material="Copper Alloy", Contact Plating=Tin, Gender=Male, Housing Material=Polyamide, Mount="Surface Mount", Packaging="Tape and Reel", REACH SVHC=Unknown, Shielding=Unshielded, Termination=SMD/SMT, Voltage Rating (DC)=24V
LED2: library part CMP-520-0010-2, "Triple Color LED, Red/green/blue, Milky White", Mount="Surface Mount", PartNumber=MSL0601RGBU1, Pick&PlaceFootprint=MSL06
M1: library part CMP-A10-0003-3, "DRV8701 Brushed DC Motor Full-Bridge Gate DC Motor Driver 5 Click Add-On Board"
Q1: library part CMP-830-0003-2, "ON SEMICONDUCTOR - FDMC8030 - Dual MOSFET, Dual N Channel, 12 A, 40 V, 0.008 ohm, 10 V, 1.5 V", Continuous Drain Current (ID)=12A, Drain to Source Breakdown Voltage=40V, Drain to Source Resistance=10mR, Gate to Source Voltage (Vgs)=12V, Input Capacitance=1.975nF, Max Operating Temperature=150°C, Max Power Dissipation=800mW, Min Operating Temperature=-55°C, Package Quantity=3000, Drain to Source Voltage (Vdss)=40V, Element Configuration=Dual, Fall Time=3ns, FET Type="2 N-Channel", Height=0.75mm, Length=3mm, Mount="Surface Mount", Number of Elements=1, Number of Pins=8, Packaging="Tape and Reel", Polarity=N-CHANNEL, Power Dissipation=800mW, Radiation Hardening=No, Rds On Max=10mR, Rise Time=3ns, RoHS Compliant=Yes, Series=PowerTrench®, Turn-Off Delay Time=19ns, Turn-On Delay Time=7ns, Weight=0.196g, Width=3mm
R1: library part CMP-633-0078-2, "Surface Mount Resistor 150 Ohm 1/16 W 0.1% 0603 (1608 Metric)", Case Code (Imperial)=0603, Case Code (Metric)=1608, Max Operating Temperature=155°C, Max Power Dissipation="62.5 mW", Min Operating Temperature=-55°C, Number of Resistors=1, Power rating=62.5mW, Resistance=150, Resistance Tolerance=0.1%, Resistor Type="FIXED RESISTOR", Temperature Coefficient=25ppm/°C, Voltage rating=50V, Case/Package=0603, Composition="Thin Film", Construction=Chip, ELV=Compliant, Height=0.45mm, Length=1.6mm, Mount="Surface Mount", Number of Pins=2, Number of Terminations=2, Packaging="Tape and Reel", Pick&PlaceFootprint=R0603, REACH SVHC=Yes, RoHS=Yes, RoHS Compliant=Yes, Series=CPF, Size Code=0603, Technology="THIN FILM", Termination=Wraparound, Tolerance=0.1%, Voltage Rating (DC)=50V, Weight=7.1E-05oz, Width=0.8mm
R2: library part CMP-633-0083-1, "Surface Mount Resistor 270 Ohm 1/16 W 0.1% 0603 (1608 Metric)", Case Code (Imperial)=0603, Case Code (Metric)=1608, Max Operating Temperature=155°C, Max Power Dissipation="62.5 mW", Min Operating Temperature=-55°C, Number of Resistors=1, Power rating=62.5mW, Resistance=270, Resistance Tolerance=0.1%, Resistor Type="FIXED RESISTOR", Temperature Coefficient=25ppm/°C, Voltage rating=50V, Case/Package=0603, Composition="Thin Film", Construction=Chip, ELV=Compliant, Height=0.45mm, Length=1.6mm, Mount="Surface Mount", Number of Pins=2, Number of Terminations=2, Packaging="Tape and Reel", Pick&PlaceFootprint=R0603, REACH SVHC=Yes, RoHS=Yes, RoHS Compliant=Yes, Series=CPF, Size Code=0603, Technology="THIN FILM", Termination=Wraparound, Tolerance=0.1%, Voltage Rating (DC)=50V, Weight=7.1E-05oz, Width=0.8mm
R3: library part CMP-633-0019-16, "Surface Mount Resistor 360 Ohm 1/16 W 0.1% 0603 (1608 Metric)", Case Code (Imperial)=0603, Case Code (Metric)=1608, Max Operating Temperature=155°C, Max Power Dissipation="62.5 mW", Min Operating Temperature=-55°C, Number of Resistors=1, Power rating=62.5mW, Resistance=360, Resistance Tolerance=0.1%, Resistor Type="Thin Film", Temperature Coefficient=25ppm/°C, Voltage rating=50V, Case/Package=0603, Composition="Thin Film", ELV=Compliant, Height=0.45mm, Length=1.6mm, Mount="Surface Mount", Number of Pins=2, Number of Terminations=2, Packaging="Tape and Reel", Pick&PlaceFootprint=R0603, REACH SVHC="No SVHC", RoHS=Yes, RoHS Compliant=Yes, Series=CPF, Size Code=0603, Technology="Thin Film", Termination=Solder, Tolerance=0.1%, Voltage Rating (DC)=50V, Weight=7.1E-05oz, Width=0.8mm
R4: library part CMP-633-0031-14, "Surface Mount Resistor 2k7 Ohm 1/16 W 0.1% 0603 (1608 Metric)", Case Code (Imperial)=0603, Case Code (Metric)=1608, Max Operating Temperature=155°C, Max Power Dissipation="62.5 mW", Min Operating Temperature=-55°C, Number of Resistors=1, Power rating=62.5mW, Resistance=2.7k, Resistance Tolerance=0.1%, Resistor Type="Thin Film", Temperature Coefficient=25ppm/°C, Voltage rating=50V, Case/Package=0603, Composition="Thin Film", ELV=Compliant, Height=0.45mm, Length=1.6mm, Mount="Surface Mount", Number of Pins=2, Number of Terminations=2, Packaging="Tape and Reel", Pick&PlaceFootprint=R0603, REACH SVHC="No SVHC", RoHS=Yes, RoHS Compliant=Yes, Series=CPF, Size Code=0603, Technology="Thin Film", Termination=Solder, Tolerance=0.1%, Voltage Rating (DC)=50V, Weight=7.1E-05oz, Width=0.8mm
R6: library part CMP-633-0000-17, "Surface Mount Resistor 100k Ohm 1/16 W 0.1% 0603 (1608 Metric)", Case Code (Imperial)=0603, Case Code (Metric)=1608, Max Operating Temperature=155°C, Max Power Dissipation="62.5 mW", Min Operating Temperature=-55°C, Number of Resistors=1, Power rating=62.5mW, Resistance=100k, Resistance Tolerance=0.1%, Resistor Type="Thin Film", Temperature Coefficient=25ppm/°C, Voltage rating=50V, Case/Package=0603, Composition="Thin Film", ELV=Compliant, Height=0.45mm, Length=1.6mm, Mount="Surface Mount", Number of Pins=2, Number of Terminations=2, Packaging="Tape and Reel", Pick&PlaceFootprint=R0603, REACH SVHC="No SVHC", RoHS=Yes, RoHS Compliant=Yes, Series=CPF, Size Code=0603, Technology="Thin Film", Termination=Solder, Tolerance=0.1%, Voltage Rating (DC)=50V, Weight=7.1E-05oz, Width=0.8mm
R7: library part CMP-633-0002-15, "Surface Mount Resistor 10k Ohm 1/16 W 0.1% 0603 (1608 Metric)", Case Code (Imperial)=0603, Case Code (Metric)=1608, Max Operating Temperature=155°C, Max Power Dissipation="62.5 mW", Min Operating Temperature=-55°C, Number of Resistors=1, Power rating=62.5mW, Resistance=10k, Resistance Tolerance=0.1%, Resistor Type="Thin Film", Temperature Coefficient=25ppm/°C, Voltage rating=50V, Case/Package=0603, Composition="Thin Film", ELV=Compliant, Height=0.45mm, Length=1.6mm, Mount="Surface Mount", Number of Pins=2, Number of Terminations=2, Packaging="Tape and Reel", Pick&PlaceFootprint=R0603, REACH SVHC="No SVHC", RoHS=Yes, RoHS Compliant=Yes, Series=CPF, Size Code=0603, Technology="Thin Film", Termination=Solder, Tolerance=0.1%, Voltage Rating (DC)=50V, Weight=7.1E-05oz, Width=0.8mm
R8: library part CMP-633-0082-1, "Surface Mount Resistor 2.49k Ohm 1/16 W 0.1% 0603 (1608 Metric)", Case Code (Imperial)=0603, Case Code (Metric)=1608, Max Operating Temperature=155°C, Max Power Dissipation="62.5 mW", Min Operating Temperature=-55°C, Number of Resistors=1, Power rating=62.5mW, Resistance=2.49k, Resistance Tolerance=0.1%, Resistor Type="FIXED RESISTOR", Temperature Coefficient=25ppm/°C, Voltage rating=50V, Case/Package=0603, Composition="Thin Film", Construction=Chip, ELV=Compliant, Height=0.45mm, Length=1.6mm, Mount="Surface Mount", Number of Pins=2, Number of Terminations=2, Packaging="Tape and Reel", Pick&PlaceFootprint=R0603, REACH SVHC=Yes, RoHS=Yes, RoHS Compliant=Yes, Series=CPF, Size Code=0603, Technology="THIN FILM", Termination=Wraparound, Tolerance=0.1%, Voltage Rating (DC)=50V, Weight=7.1E-05oz, Width=0.8mm
R9: library part CMP-633-0029-14, "Surface Mount Resistor 1k5 Ohm 1/16 W 0.1% 0603 (1608 Metric)", Case Code (Imperial)=0603, Case Code (Metric)=1608, Max Operating Temperature=155°C, Max Power Dissipation="62.5 mW", Min Operating Temperature=-55°C, Number of Resistors=1, Power rating=62.5mW, Resistance=1.5k, Resistance Tolerance=0.1%, Resistor Type="Thin Film", Temperature Coefficient=25ppm/°C, Voltage rating=50V, Case/Package=0603, Composition="Thin Film", ELV=Compliant, Height=0.45mm, Length=1.6mm, Mount="Surface Mount", Number of Pins=2, Number of Terminations=2, Packaging="Tape and Reel", Pick&PlaceFootprint=R0603, REACH SVHC="No SVHC", RoHS=Yes, RoHS Compliant=Yes, Series=CPF, Size Code=0603, Technology="Thin Film", Termination=Solder, Tolerance=0.1%, Voltage Rating (DC)=50V, Weight=7.1E-05oz, Width=0.8mm
R10: library part CMP-633-0030-9, "Surface Mount Resistor 560 Ohm 1/16 W 0.1% 0603 (1608 Metric)", Case Code (Imperial)=0603, Case Code (Metric)=1608, Max Operating Temperature=155°C, Max Power Dissipation="62.5 mW", Min Operating Temperature=-55°C, Number of Resistors=1, Power rating=62.5mW, Resistance=560, Resistance Tolerance=0.1%, Resistor Type="Thin Film", Temperature Coefficient=25ppm/°C, Voltage rating=50V, Case/Package=0603, Composition="Thin Film", ELV=Compliant, Height=0.45mm, Length=1.6mm, Mount="Surface Mount", Number of Pins=2, Number of Terminations=2, Packaging="Tape and Reel", Pick&PlaceFootprint=R0603, REACH SVHC="No SVHC", RoHS=Yes, RoHS Compliant=Yes, Series=CPF, Size Code=0603, Technology="Thin Film", Termination=Solder, Tolerance=0.1%, Voltage Rating (DC)=50V, Weight=7.1E-05oz, Width=0.8mm
R11: library part CMP-633-0020-13, "Surface Mount Resistor 470 Ohm 1/16 W 0.1% 0603 (1608 Metric)", Case Code (Imperial)=0603, Case Code (Metric)=1608, Max Operating Temperature=155°C, Max Power Dissipation="62.5 mW", Min Operating Temperature=-55°C, Number of Resistors=1, Power rating=62.5mW, Resistance=470, Resistance Tolerance=0.1%, Resistor Type="Thin Film", Temperature Coefficient=25ppm/°C, Voltage rating=50V, Case/Package=0603, Composition="Thin Film", ELV=Compliant, Height=0.45mm, Length=1.6mm, Mount="Surface Mount", Number of Pins=2, Number of Terminations=2, Packaging="Tape and Reel", Pick&PlaceFootprint=R0603, REACH SVHC="No SVHC", RoHS=Yes, RoHS Compliant=Yes, Series=CPF, Size Code=0603, Technology="Thin Film", Termination=Solder, Tolerance=0.1%, Voltage Rating (DC)=50V, Weight=7.1E-05oz, Width=0.8mm
U1: library part CMP-530-0000-11, "TOSHIBA         TLP2368(E(O             Digital Output Optocoupler, Open Collector, 1 Channel, SOIC, 5 Pins, 3.75 kV, 20 Mbaud", Case/Package=SO, Forward Current=25mA, Forward Voltage=1.7V, Input Current=14mA, Isolation Voltage=3.75kV, Max Operating Temperature=125°C, Min Operating Temperature=-40°C, PartNumber=TLP2368(E(O, Power Dissipation=60mW, Reverse Breakdown Voltage=5V, Direction=Unidirectional, Mount="Surface Mount", Number of Channels=1, Number of Elements=1, Number of Pins=5, Output Current=25mA, Packaging="Tape and Reel", Pick&PlaceFootprint=SO6, Propagation Delay=60ns, Radiation Hardening=No, REACH SVHC="No SVHC"
U2: library part CMP-820-0000-4, "Low-Capacitance 3-Channel +/-15KV ESD-Protection Array for High-Speed Data Interfaces 5-SOT-5X3", Mount="Surface Mount", PartNumber=TPD3E001DRLR, Pick&PlaceFootprint=DRL-5
U3: library part CMP-A10-0005-5, "60-V input, 1-V to 16-V output, 1.5-A power module in enhanced HotRod™ QFN package 15-B3QFN -40 to 125", PartNumber=TPSM5601R5HRDAR, Pick&PlaceFootprint=B3QFN

## Free pads (board coordinates)
  round 6 hole 3.1 unplated mask+0: MH1(4,4) MH2(4,47.325) MH3(54,47) MH4(54,4)

## Via types
v1: diameter 0.55, hole 0.25, Top Layer to Bottom Layer, tented both sides, 27 vias

## Nets (pads, with @x,y where several pads share a name; then routed paths per layer and width w, separated by ;. In a path a pad name is that pad's centre, name@x,y a point inside that pad or via, vN(x,y) a via of type N, cw(c..) or ccw(c..) an arc to the next point about the centre after c; other vN are vias at no path point)
3V3: C2.2 C3.2 J2.36 J4.4 J7.2 J7.4 LED2.1 R3.2 U1.6 U2.5 | length 106.5
  Top Layer w0.203: R3.2 33.398,14.202 33.658,13.942 U1.6
  Top Layer w0.254: v1(39.1,17.525) 39.1,11.922 39.249,11.773 C2.2 41.127,11.773 41.149,11.751 U2.5
  Top Layer w0.305: U1.6 34.73,15.13 35.273,15.673 C3.2 35.273,17.148 35.65,17.525 v1(39.1,17.525)
  Top Layer w0.4: J7.4 18.125,47.141 18.359,47.375 20.549,47.375 ; J7.2 20.625,47.299 20.549,47.375 ; LED2.1 56.686,27.013 51.613,32.086 51.613,34.667 J2.36 40.155,46.125 23.525,46.125 22.275,47.375 20.549,47.375
  Int2 w0.4: J4.4 39.2,43.25 43.03,43.25 J2.36
  Bottom Layer w0.4: v1(39.1,17.525) 43.625,22.05 43.625,36.595 J2.36
\SLEEP: J1.6 M1.2 | length 38.8
  Top Layer w0.203: J1.6 29.975,35.985 29.975,33.8 29.45,33.275 28.4,33.275 27.575,32.45 27.575,23.9 28.375,23.1 40.15,23.1 42.75,20.5 48,20.5 M1.2
BEAM_BREAK: J1.7 J7.1 | length 20.1
  Top Layer w0.203: J7.1 23.035,45.906 25.491,43.45 29.3,43.45 30.275,42.475 30.275,39.025 29.575,38.325 28.35,38.325 27.575,37.55 27.575,35.845 J1.7
BLUE_LED: J1.10 R10.2 | length 22.4
  Top Layer w0.203: J1.10 29.972,25.828 48.553,25.828 48.725,26 R10.2
BNC_INPUT: J1.15 R3.1 U1.5 | length 8.7
  Top Layer w0.203: J1.15 29.114,14.225 29.701,13.637 31.184,13.637 32,12.821 R3.1 35.698,12.798 36,13.1 U1.5
BNC_INPUT_EX: J5.1 R2.1 | length 35.5
  Top Layer w0.203: J5.1 9,11 17.601,2.399 26.949,2.399 27.6,3.05 30.95,3.05 32,4.1 R2.1
DC24V: C1.1 C4.2 C5.2 C6.2 J3.2 J8.1 R4.2 U3.1 U3.2 U3.14 | length 30.3
  Bottom Layer w0.203: J8.1 15.35,16.503 16.595,17.748 16.595,19.37 17.725,20.5 R4.2 ; U3.2 17.65,38.05 18,37.7 U3.1 17.958,37.355 U3.1@17.809,37.503
  Bottom Layer w0.8: C4.2 25.95,34.5 27.275,35.825 30.325,35.825 32.225,37.725 32.225,43.7 33.249,44.724 35.901,44.724 36.875,45.698 J3.2
  other v1: 16.75,31 17.25,31 17.75,31 23.25,31 23.75,31 24.25,31 16.75,31.5 17.25,31.5 17.75,31.5 23.25,31.5 23.75,31.5 24.25,31.5 16.75,32 17.25,32 17.75,32 23.25,32 23.75,32 24.25,32
ENC_ONE: J1.12 J4.5 | length 22.2
  Bottom Layer w0.305: J1.12 40.315,33.285 J4.5
ENC_TWO: J1.14 J4.6 | length 31.3
  Bottom Layer w0.305: J1.14 42.1,29.99 42.1,40.04 J4.6
GND: C1.2 C2.1 C3.1 C4.1 C5.1 C6.1 C7.1 C8.1 J1.3 J1.8 J1.13 J1.18 J2.23 J2.28 J2.38 J3.1 J4.3 J5.2 J5.SH1 J5.SH2 J6.2 J6.SH1 J6.SH2 J7.3 M1.8 M1.9 Q1.4 Q1.5 R8.1 U1.3 U1.4 U2.3 U3.10 U3.15 U3.16 U3.17 U3.18 U3.19 U3.20 U3.21 U3.22 U3.23 U3.24 U3.25 U3.26 | length 6.8
  Bottom Layer w0.203: U3.24 20.052,40.448 20.462,40.448 20.63,40.28 U3.10 23.253,40.28 23.718,39.815 25.494,39.815 26.179,40.5 R8.1
GREEN_LED: J1.9 R11.2 | length 22.5
  Top Layer w0.203: J1.9 39.011,29.465 40.476,28 R11.2
IO1: J6.1 R1.2 U2.1 | length 74.9
  Top Layer w0.203: J6.1 9,20.35 5.45,16.8 5.45,13.9 17.5,1.85 27.013,1.85 27.788,2.625 36.95,2.625 42.5,8.175 42.5,12.2 43,12.7 43,14.819 R1.2
NetD1_1: D1.1 J8.2 Q1.9 Q1.10
NetD1_2: D1.2 Q1.1 Q1.8 R4.1 | length 8.5
  Top Layer w0.203: v1@20.45,21.346 20.463,21.36 24.26,21.36 v1(24.275,21.375)
  Bottom Layer w0.203: D1.2 20.35,19.328 20.452,19.43 R4.1 20.452,21.702 20.652,21.901 20.775,22.025 Q1.1 ; Q1.8 23.625,22.025 v1(24.275,21.375)
  other v1: 20.452,21.344
NetLED2_2: LED2.2 R11.1 | length 5.4
  Top Layer w0.203: R11.1 53.25,28 55.138,26.113 LED2.2
NetLED2_3: LED2.3 R10.1 | length 4.9
  Top Layer w0.203: R10.1 53.25,26 54.038,25.212 LED2.3
NetLED2_4: LED2.4 R9.1 | length 4.7
  Top Layer w0.203: R9.1 53.5,24 53.812,24.312 LED2.4
NetR2_2: R2.2 U1.1 | length 4
  Top Layer w0.203: R2.2 34.073,8.702 34.73,8.045 U1.1
NetR6_1: R6.1 U3.12 | length 2.6
  Bottom Layer w0.203: U3.12 22.895,38.98 23.375,38.5 R6.1
NetR6_2: R6.2 U3.11 | length 4.3
  Bottom Layer w0.203: U3.11 22.895,39.63 23.275,39.25 25.429,39.25 26.179,38.5 R6.2
NetR7_1: R7.1 R8.2 U3.9 | length 4.1
  Bottom Layer w0.203: U3.9 23.07,40.93 23.5,40.5 R8.2 R7.1
OUT1: J3.4 J4.2 | length 6.7
  Bottom Layer w0.8: J4.2 35.344,41.934 35.934,41.934 39.375,45.375 J3.4
OUT2: J3.3 J4.1 | length 10.8
  Bottom Layer w0.8: J4.1 33.5,41.02 33.5,42.5 34.5,43.5 36.1,43.5 38.125,45.525 J3.3
PELLET_DELIVERED: J2.27 R1.1 | length 3.7
  Top Layer w0.203: R1.1 46.592,16.702 J2.27
PWM_OUT_ONE: J1.4 M1.16 | length 21.4
  Top Layer w0.203: M1.16 26.335,39.625 J1.4
PWM_OUT_TWO: J1.5 M1.15 | length 21.8
  Top Layer w0.203: M1.15 27.475,20.445 27.475,23 26.925,23.55 26.925,37.675 J1.5
RED_LED: J1.11 R9.2 | length 22.9
  Top Layer w0.203: J1.11 29.915,25.425 48.575,25.425 50,24 R9.2
VCC: C7.2 C8.2 J2.39 R7.2 U3.7 U3.8 | length 34
  Int2 w0.8: v1(17.5,48.5) v1(18.5,48.5) v1(19.5,48.5) v1(20.5,48.5) v1(21.5,48.5) v1(22.5,48.5) ; v1@22.508,48.492 29.392,48.492 30.639,47.245 J2.39
  Bottom Layer w0.203: C8.2 25,44.5 26.202,43.298 R7.2
pads on no net: J1.1 J1.2 J1.16 J1.17 J1.19 J1.20 J2.21 J2.22 J2.24 J2.25 J2.26 J2.29 J2.30 J2.31 J2.32 J2.33 J2.34 J2.35 J2.37 J2.40 J3.5 J3.6 J7.5 J7.6 J8.3 J8.4 J8.5 M1.1 M1.3 M1.4 M1.5 M1.6 M1.7 M1.10 M1.11 M1.12 M1.13 M1.14 U2.2 U2.4 U3.3 U3.4 U3.5 U3.6 U3.13

## Polygon pours and split planes (outlines as drawn)
GND on Bottom Layer "GND_L04_P007" (solid, pour order 16): 0,0 58,0 58,51.325 0,51.325
DC24V on Bottom Layer "DC24V_L04_P002" (solid, pour order 11): 14.05,13.675 18.25,13.675 18.25,36.685 18.7,37.135 18.7,37.61 16.325,37.61 14.05,35.335
DC24V on Bottom Layer "DC24V_L04_P002" (solid, pour order 10): 22.7,35.685 22.7,30.5 24.625,30.5 24.625,35.86 23.7,36.785 23.7,37.61 21.3,37.61 21.3,37.085
VCC on Bottom Layer "VCC_L04_P001" (solid, pour order 9): 21.3,41.875 21.3,41.4 23.7,41.4 23.7,42.225 24.625,43.15 24.625,49 15.4,49 15.4,43.15 16.325,42.225 16.325,41.4 18.7,41.4 18.7,41.875 17.3,43.275 17.3,46.325 22.7,46.325 22.7,43.275
NetD1_1 on Bottom Layer "NETD1_1_L04_P000" (solid, pour order 8): 21.275,24.275 21.275,18.25 20.45,17.425 20.45,3.475 24.475,3.475 24.475,20.4 23.125,21.75 23.125,24.275
GND on Int2 "GND_L03_P006" (solid, pour order 15): 0,0 58,0 58,51.325 0,51.325
DC24V on Int2 "DC24V_L03_P003" (solid, pour order 12): 24.625,30.5 24.625,32.5 16.25,32.5 16.25,30.5
GND on Top Layer "GND_L01_P004" (solid, pour order 13): 0,0 58,0 58,51.325 0,51.325
GND on Int1 "GND_L02_P005" (solid, pour order 14): 0,0 58,0 58,51.325 0,51.325

## Other copper
Top Layer:
  pour cut-out: 17.592,44.979 18.715,44.979 18.715,45.1 17.592,45.1
  pour cut-out: 20.035,44.979 22.408,44.979 22.408,45.1 20.035,45.1
Bottom Layer:
  pour cut-out: 26.5,41.55 26.5,38.95 26.8,38.95 26.8,41.55

## Silkscreen, mask and mechanical layers (free items; w line width, h text height)
Mechanical 1:
  the board outline again, w0.2
Fab Notes:
  drawing of 399 lines, arcs and shapes, not listed
  text "Layer" at 71.42,95.992 h1.56
  text "Name" at 82.087,95.992 h1.56
  text "Material" at 116.718,95.992 h1.56
  text "Thickness" at 137.804,95.992 h1.56
  text "Constant" at 154.723,95.992 h1.56
  text "Board Layer Stack" at 169.558,95.992 h1.56
  text "Top Overlay" at 82.087,92.866 h1.56
  text "Top Solder" at 82.087,89.739 h1.56
  text "SM-001" at 116.718,89.739 h1.56
  text "0.030mm" at 137.804,89.739 h1.56
  text "4" at 154.723,89.739 h1.56
  text "Top Surface Finish" at 82.087,86.612 h1.56
  text "Nickel, Gold" at 116.718,86.612 h1.56
  text "0.004mm" at 137.804,86.612 h1.56
  text "1" at 71.42,83.486 h1.56
  text "Top Layer" at 82.087,83.486 h1.56
  text "Foil" at 116.718,83.486 h1.56
  text "0.071mm" at 137.804,83.486 h1.56
  text "Dielectric 1" at 82.087,80.359 h1.56
  text "VT47 - 106" at 116.718,80.359 h1.56
  text "0.059mm" at 137.804,80.359 h1.56
  text "3.8" at 154.723,80.359 h1.56
  text "Dielectric 2" at 82.087,77.232 h1.56
  text "VT47 - 106" at 116.718,77.232 h1.56
  text "0.059mm" at 137.804,77.232 h1.56
  text "3.8" at 154.723,77.232 h1.56
  text "2" at 71.42,74.106 h1.56
  text "Int1" at 82.087,74.106 h1.56
  text "CU Layer" at 116.718,74.106 h1.56
  text "0.037mm" at 137.804,74.106 h1.56
  text "Dielectric 3" at 82.087,70.979 h1.56
  text "VT47 - Core" at 116.718,70.979 h1.56
  text "1.040mm" at 137.804,70.979 h1.56
  text "4.6" at 154.723,70.979 h1.56
  text "3" at 71.42,67.852 h1.56
  text "Int2" at 82.087,67.852 h1.56
  text "CU Layer" at 116.718,67.852 h1.56
  text "0.037mm" at 137.804,67.852 h1.56
  text "Dielectric 4" at 82.087,64.726 h1.56
  text "VT47 - 106" at 116.718,64.726 h1.56
  text "0.059mm" at 137.804,64.726 h1.56
  text "3.8" at 154.723,64.726 h1.56
  text "Dielectric 5" at 82.087,61.599 h1.56
  text "VT47 - 106" at 116.718,61.599 h1.56
  text "0.059mm" at 137.804,61.599 h1.56
  text "3.8" at 154.723,61.599 h1.56
  text "4" at 71.42,58.472 h1.56
  text "Bottom Layer" at 82.087,58.472 h1.56
  text "Foil" at 116.718,58.472 h1.56
  text "0.071mm" at 137.804,58.472 h1.56
  text "Bottom Surface Finish" at 82.087,55.346 h1.56
  text "Nickel, Gold" at 116.718,55.346 h1.56
  text "0.004mm" at 137.804,55.346 h1.56
  text "Bottom Solder" at 82.087,52.219 h1.56
  text "SM-001" at 116.718,52.219 h1.56
  text "0.030mm" at 137.804,52.219 h1.56
  text "4" at 154.723,52.219 h1.56
  text "Bottom Overlay" at 82.087,49.092 h1.56
  text "Total board thickness:" at 71.42,45.966 h1.56
  text "1.560mm" at 137.804,45.966 h1.56
Drill Drawing:
  circle w0.254: c71.246,24.774 r0.847
  lines w0.254: 70.399,5.724 71.246,4.877 72.092,5.724 71.246,6.57 70.399,5.724 ; 70.399,9.11 70.822,9.11 70.822,8.687 71.669,8.687 71.669,9.11 72.092,9.11 72.092,9.957 71.669,9.957 71.669,10.38 70.822,10.38 70.822,9.957 70.399,9.957 70.399,9.11 ; 70.399,12.92 70.822,12.92 71.246,12.497 71.669,12.92 72.092,12.92 71.669,13.344 72.092,13.767 71.669,13.767 71.246,14.19 70.822,13.767 70.399,13.767 70.822,13.344 70.399,12.92 ; 70.399,16.307 71.246,16.73 72.092,16.307 71.669,17.154 72.092,18 71.246,17.577 70.399,18 70.822,17.154 70.399,16.307 ; 70.399,21.81 72.092,21.81 71.246,20.117 70.399,21.81 ; 70.399,27.737 72.092,27.737 72.092,29.43 70.399,29.43 70.399,27.737 ; 70.399,31.547 70.399,31.97 70.822,32.394 70.399,32.817 70.399,33.24 70.822,33.24 71.246,32.817 71.669,33.24 72.092,33.24 72.092,32.817 71.669,32.394 72.092,31.97 72.092,31.547 71.669,31.547 71.246,31.97 70.822,31.547 70.399,31.547
  lines w0.381: 68.88,3.734 342.464,3.734 ; 68.88,34.214 342.464,34.214 ; 82.873,-0.076 82.873,38.024 ; 97.601,-0.076 97.601,38.024 ; 126.548,-0.076 126.548,38.024 ; 139.397,-0.076 139.397,38.024 ; 158.036,-0.076 158.036,38.024 ; 196.125,-0.076 196.125,38.024 ; 211.107,-0.076 211.107,38.024 ; 230.05,-0.076 230.05,38.024 ; 251.888,-0.076 251.888,38.024 ; 273.573,-0.076 273.573,38.024 ; 307.447,-0.076 307.447,38.024 ; 68.88,-0.076 342.464,-0.076 342.464,38.024 68.88,38.024 68.88,-0.076
  text "Symbol" at 71.166,35.357 h1.83
  text "Count" at 84.016,35.357 h1.83
  text "Hole Size" at 98.744,35.357 h1.83
  text "Plated" at 127.691,35.357 h1.83
  text "Hole Type" at 140.54,35.357 h1.83
  text "Drill Layer Pair" at 159.179,35.357 h1.83
  text "Via/Pad" at 197.268,35.357 h1.83
  text "Pad Shape" at 212.25,35.357 h1.83
  text "Template" at 231.193,35.357 h1.83
  text "Description" at 253.031,35.357 h1.83
  text "Hole Tolerance (+)" at 274.716,35.357 h1.83
  text "Hole Tolerance (-)" at 308.59,35.357 h1.83
  text "2" at 84.016,31.547 h1.52
  text "1.854mm (73.00mil)" at 98.744,31.547 h1.52
  text "PTH" at 127.691,31.547 h1.52
  text "Round" at 140.54,31.547 h1.52
  text "Top Layer - Bottom Layer" at 159.179,31.547 h1.52
  text "Pad" at 197.268,31.547 h1.52
  text "Rounded" at 212.25,31.547 h1.52
  text "c185h185m0mx0" at 231.193,31.547 h1.52
  text "4" at 84.016,27.737 h1.52
  text "0.900mm (35.43mil)" at 98.744,27.737 h1.52
  text "PTH" at 127.691,27.737 h1.52
  text "Round" at 140.54,27.737 h1.52
  text "Top Layer - Bottom Layer" at 159.179,27.737 h1.52
  text "Pad" at 197.268,27.737 h1.52
  text "Rounded" at 212.25,27.737 h1.52
  text "c141h90m0mx0" at 231.193,27.737 h1.52
  text "4" at 84.016,23.927 h1.52
  text "2.010mm (79.13mil)" at 98.744,23.927 h1.52
  text "PTH" at 127.691,23.927 h1.52
  text "Round" at 140.54,23.927 h1.52
  text "Top Layer - Bottom Layer" at 159.179,23.927 h1.52
  text "Pad" at 197.268,23.927 h1.52
  text "Rounded" at 212.25,23.927 h1.52
  text "c302h201m0mx0" at 231.193,23.927 h1.52
  text "4" at 84.016,20.117 h1.52
  text "3.100mm (122.05mil)" at 98.744,20.117 h1.52
  text "NPTH" at 127.691,20.117 h1.52
  text "Round" at 140.54,20.117 h1.52
  text "Top Layer - Bottom Layer" at 159.179,20.117 h1.52
  text "Pad" at 197.268,20.117 h1.52
  text "Rounded" at 212.25,20.117 h1.52
  text "c600hn310m600" at 231.193,20.117 h1.52
  text "6" at 84.016,16.307 h1.52
  text "1.020mm (40.16mil)" at 98.744,16.307 h1.52
  text "PTH" at 127.691,16.307 h1.52
  text "Round" at 140.54,16.307 h1.52
  text "Top Layer - Bottom Layer" at 159.179,16.307 h1.52
  text "Pad" at 197.268,16.307 h1.52
  text "(Mixed)" at 212.25,16.307 h1.52
  text "(Mixed)" at 231.193,16.307 h1.52
  text "16" at 84.016,12.497 h1.52
  text "0.889mm (35.00mil)" at 98.744,12.497 h1.52
  text "PTH" at 127.691,12.497 h1.52
  text "Round" at 140.54,12.497 h1.52
  text "Top Layer - Bottom Layer" at 159.179,12.497 h1.52
  text "Pad" at 197.268,12.497 h1.52
  text "(Mixed)" at 212.25,12.497 h1.52
  text "(Mixed)" at 231.193,12.497 h1.52
  text "38" at 84.016,8.687 h1.52
  text "0.250mm (9.84mil)" at 98.744,8.687 h1.52
  text "PTH" at 127.691,8.687 h1.52
  text "Round" at 140.54,8.687 h1.52
  text "Top Layer - Bottom Layer" at 159.179,8.687 h1.52
  text "(Mixed)" at 197.268,8.687 h1.52
  text "Rounded" at 212.25,8.687 h1.52
  text "(Mixed)" at 231.193,8.687 h1.52
  text "40" at 84.016,4.877 h1.52
  text "1.040mm (40.95mil)" at 98.744,4.877 h1.52
  text "PTH" at 127.691,4.877 h1.52
  text "Round" at 140.54,4.877 h1.52
  text "Top Layer - Bottom Layer" at 159.179,4.877 h1.52
  text "Pad" at 197.268,4.877 h1.52
  text "(Mixed)" at 212.25,4.877 h1.52
  text "(Mixed)" at 231.193,4.877 h1.52
  text "114 Total" at 84.016,1.067 h1.52

## Text inside footprints (layer, text, board x,y; h text height)
C1: Bottom Overlay "-" at 24.588,29.262 h1.52 r180; Bottom Overlay "+" at 14.428,29.262 h1.52 r180
U1: Top Overlay "*" at 34.391,6.487 h1.27 r90; Top Assembly "*" at 35.483,8.163 h1.27 r90